# EAGLE board V3_Panel (EAGLE 9.6.0), part 1 of 3
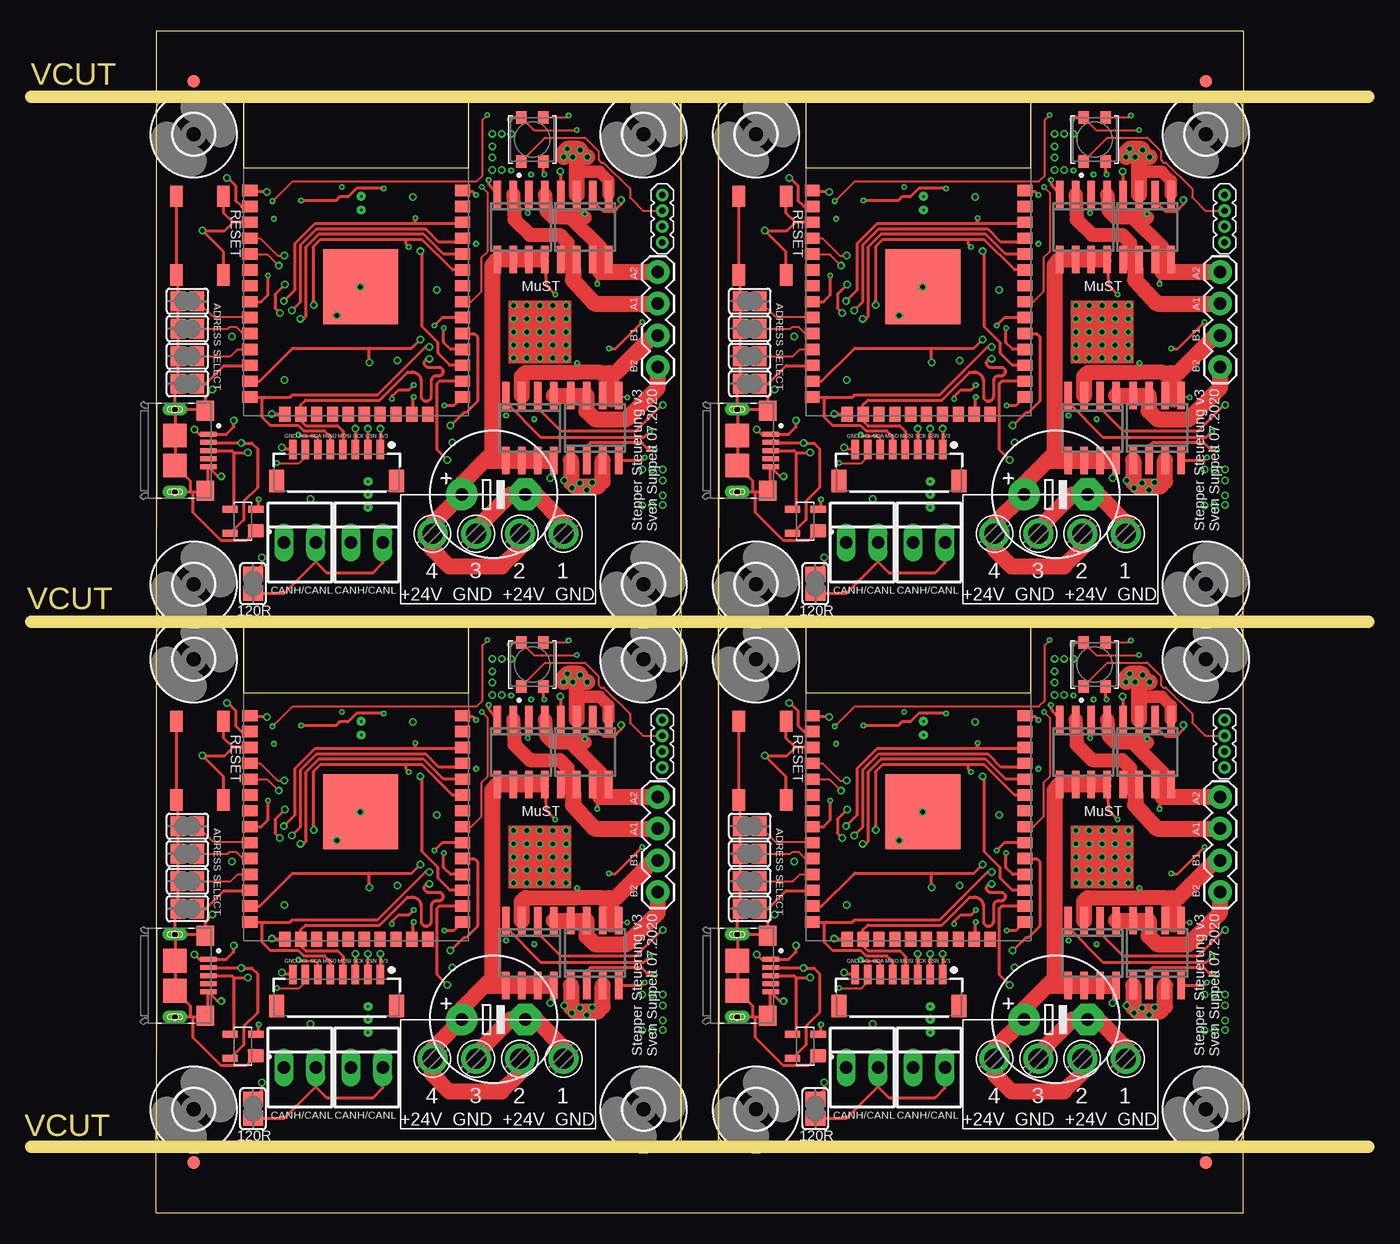
[diagram p0: board, top side]
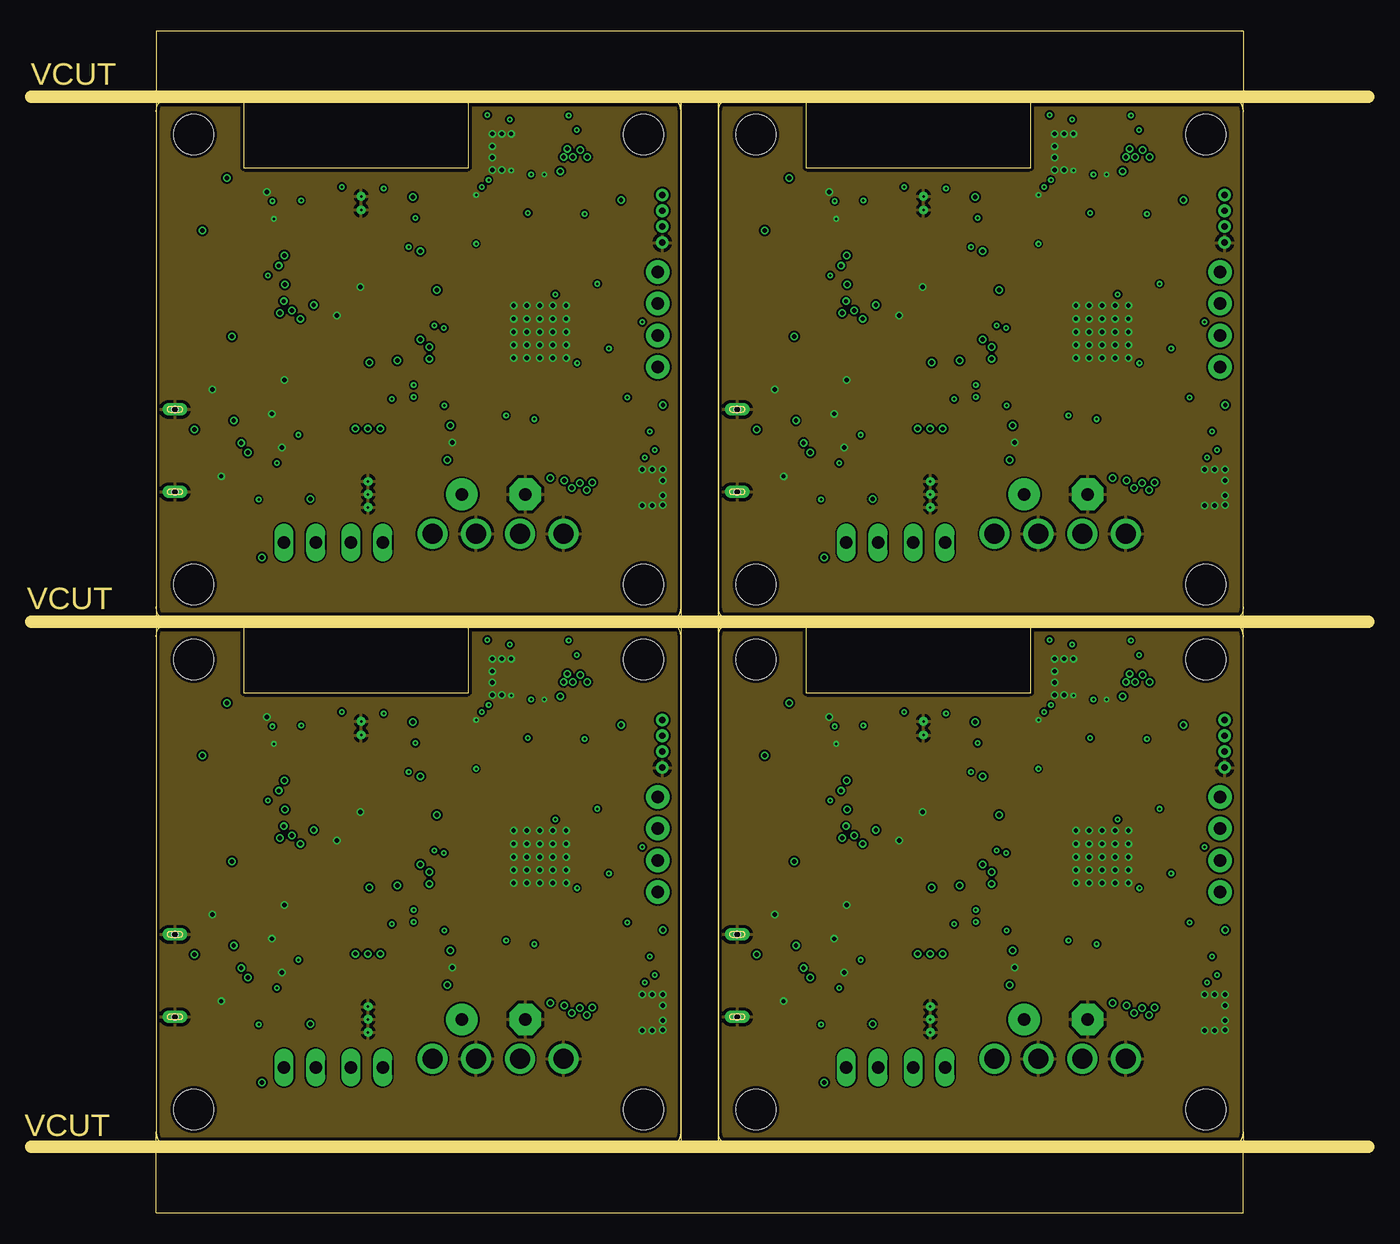
[diagram p1: board, inner layer Route2]
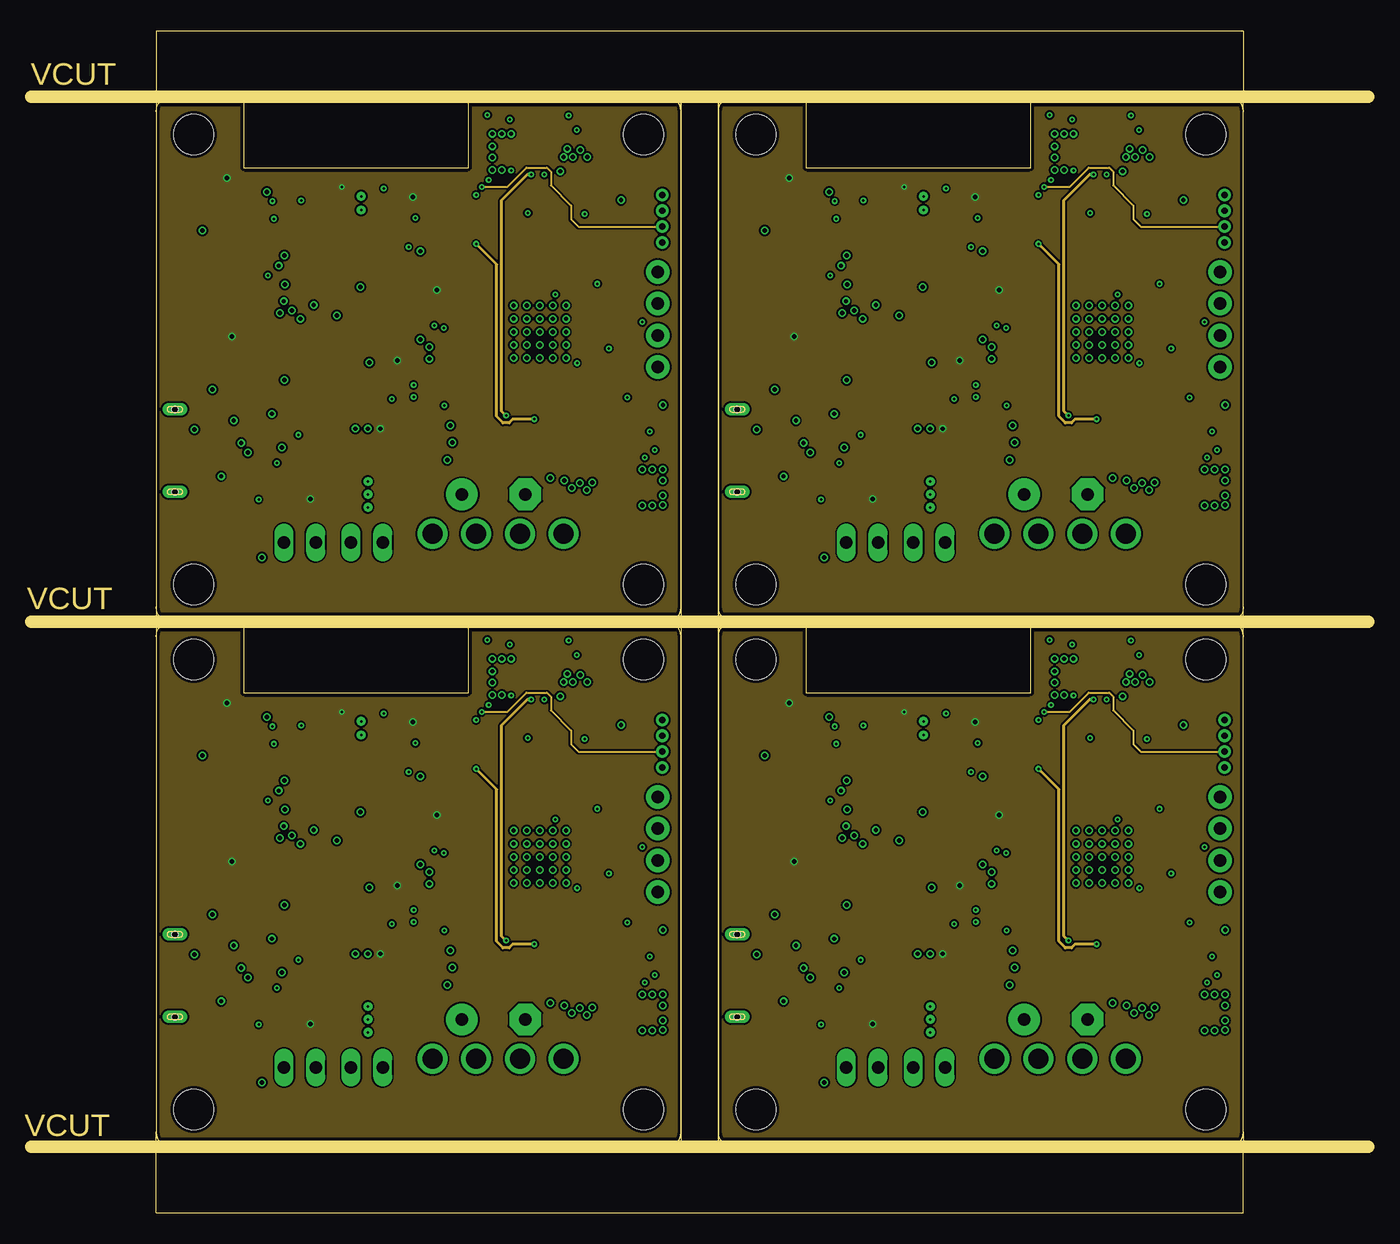
[diagram p2: board, inner layer Route15]
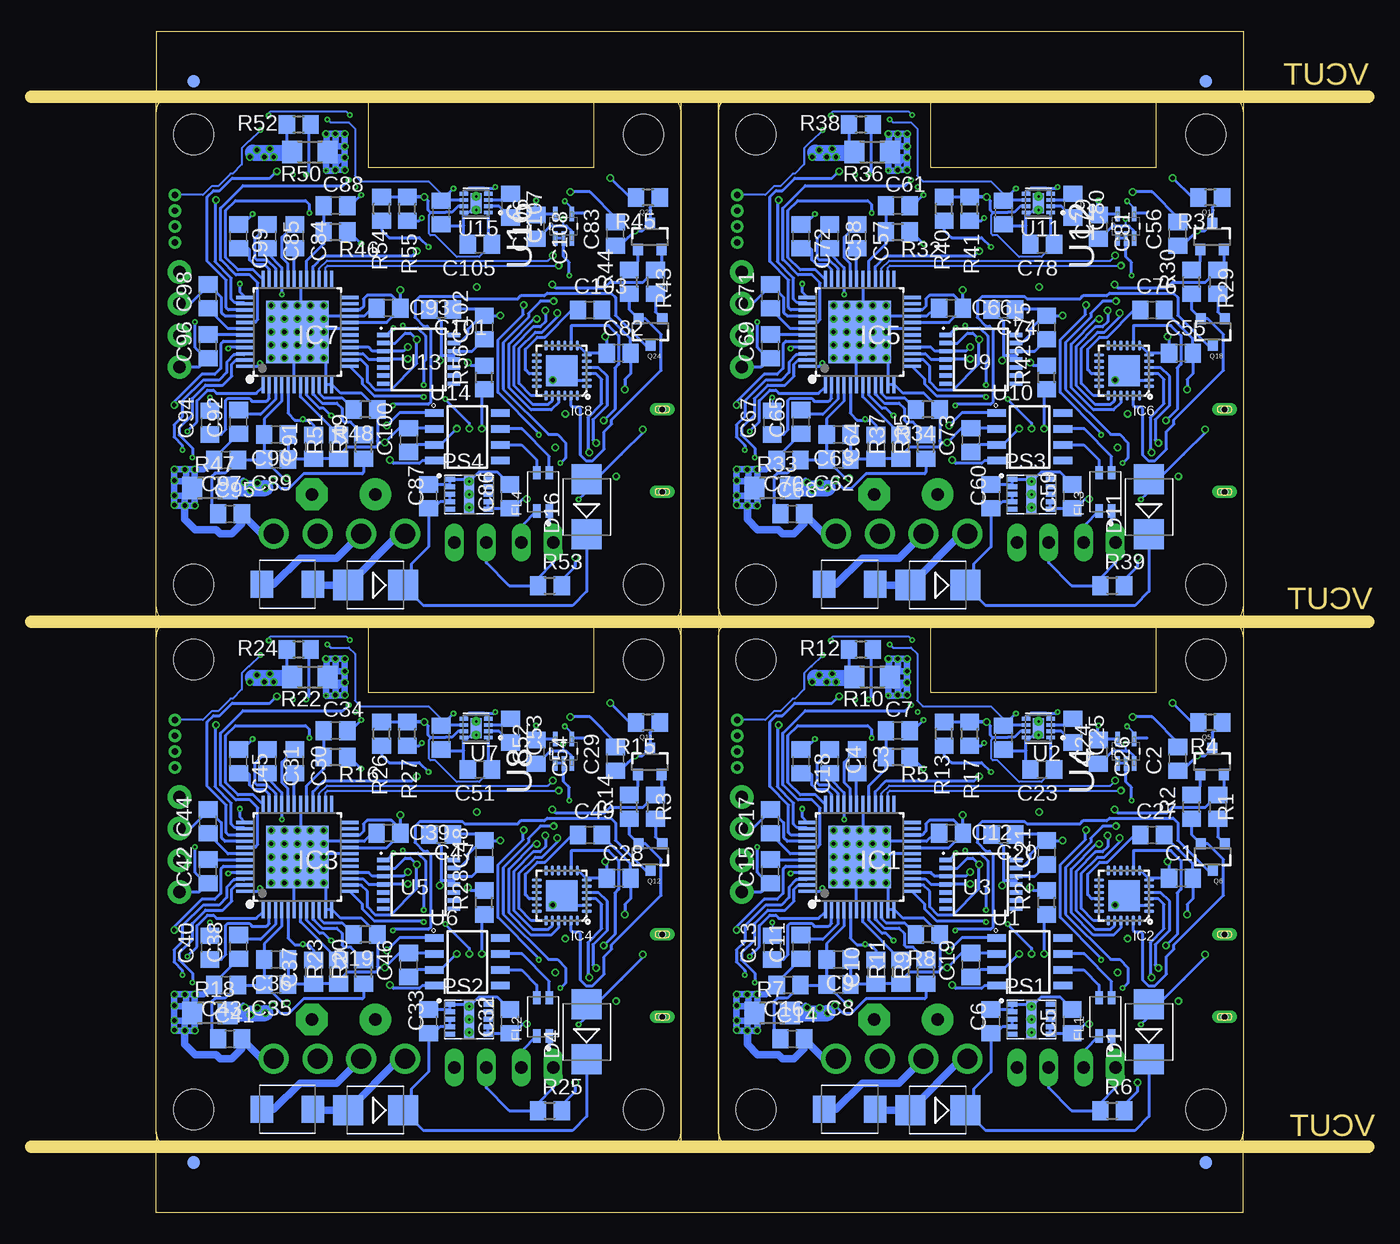
[diagram p3: board, bottom side, seen from below]

Size 107 x 94.5 mm. Coordinates in mm from the lower left corner, seen from the top.
Outline: 0,5.25 107,5.25
Outline: 0,47.25 107,47.25
Outline: 0,89.25 107,89.25
Outline: 52,6.45 52,46.05 arc90 50.8,47.25 arc90 52,48.45 52,88.05 arc90 50.8,89.25 56.2,89.25 arc90 55,88.05 55,48.45 arc90 56.2,47.25 arc90 55,46.05 55,6.45 arc90 56.2,5.25 50.8,5.25 arc90 52,6.45
Outline: 10,46.05 10,6.45 arc90 11.2,5.25 10,5.25 10,0 97,0 97,5.25 95.8,5.25 arc90 97,6.45 97,46.05 arc90 95.8,47.25 arc90 97,48.45 97,88.05 arc90 95.8,89.25 97,89.25 97,94.5 10,94.5 10,89.25 11.2,89.25 arc90 10,88.05 10,48.45 arc90 11.2,47.25 arc90 10,46.05
Outline: 16.6,47.25 arc-90 17,46.85 17,41.6 35,41.6 35,46.85 arc-90 35.4,47.25 16.6,47.25
Outline: 61.6,47.25 arc-90 62,46.85 62,41.6 80,41.6 80,46.85 arc-90 80.4,47.25 61.6,47.25
Outline: 16.6,89.25 arc-90 17,88.85 17,83.6 35,83.6 35,88.85 arc-90 35.4,89.25 16.6,89.25
Outline: 61.6,89.25 arc-90 62,88.85 62,83.6 80,83.6 80,88.85 arc-90 80.4,89.25 61.6,89.25
Copper layers (1+2)*(15+16): Top 0.035mm / dielectric 0.2mm / Route2 0.0175mm / dielectric 1.065mm / Route15 0.0175mm / dielectric 0.2mm / Bottom 0.035mm
Design rules "default *": minimum track width 6mil, minimum drill 0.2mm, track to track 6mil, track to pad 6mil, pad to pad 6mil, via to via 6mil, smd to smd 6mil, copper to edge 10mil, drill to drill 6mil, minimum pad ring 10mil, minimum via ring 0.125mm, stop-mask expansion 4mil, vias tented up to drill 0.4mm, thermal gap 10mil
Milling: area 52,5.2 to 55,89.2; area 50.8,88 to 52,89.2; area 55,88 to 56.2,89.2; area 50.8,46 to 52,48.5; area 55,46 to 56.2,48.5; area 50.8,5.2 to 52,6.5; area 55,5.2 to 56.2,6.5; area 10,5.2 to 11.2,6.5; area 10,46 to 11.2,48.5; area 10,88 to 11.2,89.2; area 95.8,88 to 97,89.2; area 95.8,46 to 97,48.5; area 95.8,5.2 to 97,6.5; area 17,83.6 to 35,89.2; area 62,83.6 to 80,89.2; area 62,41.6 to 80,47.2; area 17,41.6 to 35,47.2

## Footprints (pad centres in the part's own frame; a part is rotated, then mirrored left to right if it is on the bottom)
C0805 = smd 1.3 x 1.5: 1 -0.95,0; 2 0.95,0
E5-10,5 = drill 1.016 pad 2.54: + -2.54,0 | drill 1.016 pad 2.54 octagon: - 2.54,0
SMB = smd 2.4 x 2.4: A 2.2,0; C -2.2,0
2659 = smd 1 x 0.85: 1 -1.75,0.875; 2 -1.75,-0.875; 3 1.75,-0.875; 4 1.75,0.875
SOT143 = smd 0.99 x 1.3: 1 -0.76,-1.025 | smd 0.59 x 1.3: 2 0.96,-1.025; 3 0.96,1.025; 4 -0.96,1.025
SMBJ = smd 1.78 x 2.16: A 2.04,0; C -2.03,0
FIDUCIAL_1MM = smd 1 x 1: 1 0,0
FIL_DLW32SH110XK2L = smd 1.05 x 0.6: 1 -1.525,-0.5; 2 1.525,-0.5; 3 1.525,0.5; 4 -1.525,0.5
TQFP48-EP = smd 0.25 x 1.45: 1 -2.75,-4.175; 2 -2.25,-4.175; 3 -1.75,-4.175; 4 -1.25,-4.175; 5 -0.75,-4.175; 6 -0.25,-4.175; 7 0.25,-4.175; 8 0.75,-4.175; 9 1.25,-4.175; 10 1.75,-4.175; 11 2.25,-4.175; 12 2.75,-4.175; 25 2.75,4.175; 26 2.25,4.175; 27 1.75,4.175; 28 1.25,4.175; 29 0.75,4.175; 30 0.25,4.175; 31 -0.25,4.175; 32 -0.75,4.175; 33 -1.25,4.175; 34 -1.75,4.175; 35 -2.25,4.175; 36 -2.75,4.175 | smd 1.45 x 0.25: 13 4.175,-2.75; 14 4.175,-2.25; 15 4.175,-1.75; 16 4.175,-1.25; 17 4.175,-0.75; 18 4.175,-0.25; 19 4.175,0.25; 20 4.175,0.75; 21 4.175,1.25; 22 4.175,1.75; 23 4.175,2.25; 24 4.175,2.75; 37 -4.175,2.75; 38 -4.175,2.25; 39 -4.175,1.75; 40 -4.175,1.25; 41 -4.175,0.75; 42 -4.175,0.25; 43 -4.175,-0.25; 44 -4.175,-0.75; 45 -4.175,-1.25; 46 -4.175,-1.75; 47 -4.175,-2.25; 48 -4.175,-2.75 | smd 5 x 5: 49 0,0
QFN24_4MM_SMSC = smd 0.8 x 0.28: 1 -2,1.25; 2 -2,0.75; 3 -2,0.25; 4 -2,-0.25; 5 -2,-0.75; 6 -2,-1.25; 13 2,-1.25; 14 2,-0.75; 15 2,-0.25; 16 2,0.25; 17 2,0.75; 18 2,1.25 | smd 0.28 x 0.8: 7 -1.25,-2; 8 -0.75,-2; 9 -0.25,-2; 10 0.25,-2; 11 0.75,-2; 12 1.25,-2; 19 1.25,2; 20 0.75,2; 21 0.25,2; 22 -0.25,2; 23 -0.75,2; 24 -1.25,2 | smd 2.5 x 2.5: THERM 0,0
1X04 = drill 1.016 pad 1.88: 1 0,0; 2 2.54,0; 3 5.08,0; 4 7.62,0
BM08B-SRSS-TB = smd 0.6 x 1.55: 1 -3.5,0; 2 -2.5,0; 3 -1.5,0; 4 -0.5,0; 5 0.5,0; 6 1.5,0; 7 2.5,0; 8 3.5,0 | smd 1.2 x 1.8: P$9 4.8,2.525; P$10 -4.8,2.525
1X04_1.27MM = drill 0.508 pad 1: 1 0,0; 2 1.27,0; 3 2.54,0; 4 3.81,0
FCI_10118193-0001LF = smd 0.4 x 1.35: 1 -1.3,2.675; 2 -0.65,2.675; 3 0,2.675; 4 0.65,2.675; 5 1.3,2.675 | smd 1.6 x 1.4: S1 -3.2,2.45; S2 3.2,2.45 | smd 1.9 x 1.9: S3 1.2,0; S4 -1.2,0 | drill 0.5 pad 0.9 long: S5 -3.3,0; S6 3.3,0 | hole 0.5: -3.3,0; 3.3,0
CONV_LMZM23600V3SILT = smd 0.75 x 0.4: 1 -1.525,1.2; 2 -1.525,0.6; 3 -1.525,0; 4 -1.525,-0.6; 5 -1.525,-1.2; 6 1.525,-1.2; 7 1.525,-0.6; 8 1.525,0; 9 1.525,0.6; 10 1.525,1.2 | smd 0.8 x 3: 11 0,0 | drill 0.2 pad 0.3: 11_1 0,1.03; 11_2 0,0; 11_3 0,-1.03
SOIC8 = smd 0.6 x 2.2: 1 -1.905,-2.6; 2 -0.635,-2.6; 3 0.635,-2.6; 4 1.905,-2.6; 5 1.905,2.6; 6 0.635,2.6; 7 -0.635,2.6; 8 -1.905,2.6
SOT23-3 = smd 0.8 x 0.9: 1 -0.95,-1; 2 0.95,-1; 3 0,1.1
R0805 = smd 1.3 x 1.5: 1 -0.95,0; 2 0.95,0
R1206 = smd 1.6 x 1.803: 1 -1.422,0; 2 1.422,0
SJ = smd 1.168 x 1.6: 1 -0.762,0; 2 0.762,0
SW_TL3342F160QG = smd 1.7 x 1: 1 -3.15,-1.9; 2 3.15,-1.9; 3 -3.15,1.9; 4 3.15,1.9
SOIC127P600X175-8N = smd 1.5 x 0.6: 1 -2.65,1.905; 2 -2.65,0.635; 3 -2.65,-0.635; 4 -2.65,-1.905; 5 2.65,-1.905; 6 2.65,-0.635; 7 2.65,0.635; 8 2.65,1.905
SON50P200X200X80-9N = smd 0.76 x 0.28: 1 -0.985,0.75; 2 -0.985,0.25; 3 -0.985,-0.25; 4 -0.985,-0.75; 5 0.985,-0.75; 6 0.985,-0.25; 7 0.985,0.25; 8 0.985,0.75 | smd 0.9 x 1.6: 9 0,0 | drill 0.2 pad 0.3: 9_1 0,0.55; 9_2 0,-0.55
SOP65P640X120-14N = smd 1 x 0.35: 1 -2.825,1.95; 2 -2.825,1.3; 3 -2.825,0.65; 4 -2.825,0; 5 -2.825,-0.65; 6 -2.825,-1.3; 7 -2.825,-1.95; 8 2.825,-1.95; 9 2.825,-1.3; 10 2.825,-0.65; 11 2.825,0; 12 2.825,0.65; 13 2.825,1.3; 14 2.825,1.95
SOT65P210X110-5N = smd 1.168 x 0.356: 1 -0.965,0.66; 2 -0.965,0; 3 -0.965,-0.66; 4 0.965,-0.66; 5 0.965,0.66
3,2 = hole 3.2: 0,0
TYP184_FT = drill 1.6 pad 2.2: 1 -5.25,-0.1; 2 -1.75,-0.1; 3 1.75,-0.1; 4 5.25,-0.1
WROOM32_SKINNY = smd 1.2 x 0.9: 1 -8.5,5; 2 -8.5,3.73; 3 -8.5,2.46; 4 -8.5,1.19; 5 -8.5,-0.08; 6 -8.5,-1.35; 7 -8.5,-2.62; 8 -8.5,-3.89; 9 -8.5,-5.16; 10 -8.5,-6.43; 11 -8.5,-7.7; 12 -8.5,-8.97; 13 -8.5,-10.24; 14 -8.5,-11.51; 25 8.5,-11.51; 26 8.5,-10.24; 27 8.5,-8.97; 28 8.5,-7.7; 29 8.5,-6.43; 30 8.5,-5.16; 31 8.5,-3.89; 32 8.5,-2.62; 33 8.5,-1.35; 34 8.5,-0.08; 35 8.5,1.19; 36 8.5,2.46; 37 8.5,3.73; 38 8.5,5 | smd 0.9 x 1.2: 15 -5.7,-12.9; 16 -4.43,-12.9; 17 -3.16,-12.9; 18 -1.89,-12.9; 19 -0.62,-12.9; 20 0.65,-12.9; 21 1.92,-12.9; 22 3.19,-12.9; 23 4.46,-12.9; 24 5.73,-12.9 | smd 6 x 6: P$1 0.34,-2.7
22-23-2021 = drill 1 long: 1 -1.27,0; 2 1.27,0

## Placement (x,y rotation side)
C1  10u  [C0805]  15,26.75 0 bottom
C2  1u  [C0805]  15.25,36.3 90 bottom
C3  22nF 100V  [C0805]  40.9,36.1 270 bottom
C4  100n  [C0805]  43.1,36.1 270 bottom
C5  47u  [C0805]  23.7,15.3 90 bottom
C6  4u7  [C0805]  30.2,15.3 90 bottom
C7  470n  [C0805]  37.65,38.55 0 bottom
C8  10u/50V  [C0805]  42.4,18.25 180 bottom
C9  10u/50V  [C0805]  42.4,20.25 180 bottom
C10  2u2  [C0805]  39.4,19.25 90 bottom
C11  2u2  [C0805]  45.4,21.25 90 bottom
C12  100n  [C0805]  33.4,30.35 0 bottom
C13  100n  [C0805]  47.7,21.2 90 bottom
C14  470n  [C0805]  46.1,13.9 0 bottom
C15  100n  [C0805]  47.85,27.3 90 bottom
C16  470n  [C0805]  46.4,18.2 180 bottom
C17  100n  [C0805]  47.85,31.3 90 bottom
C18  100n  [C0805]  45.4,36.1 270 bottom
C19  100n  [C0805]  31.8,19.8 90 bottom
C20  10u  [C0805]  29.2,30.25 0 bottom
C21  100n  [C0805]  25.75,28.8 90 bottom
C22  [E5-10,5]  37,15.45 0 top
C23  4u7  [C0805]  26.1,35.45 180 bottom
C24  4u7  [C0805]  29.2,38 270 bottom
C25  1u  [C0805]  23.65,38.55 270 bottom
C26  100n  [C0805]  21.6,36.85 270 bottom
C27  4u7  [C0805]  17.3,30.2 0 bottom
C28  10u  [C0805]  60,26.75 0 bottom
C29  1u  [C0805]  60.25,36.3 90 bottom
C30  22nF 100V  [C0805]  85.9,36.1 270 bottom
C31  100n  [C0805]  88.1,36.1 270 bottom
C32  47u  [C0805]  68.7,15.3 90 bottom
C33  4u7  [C0805]  75.2,15.3 90 bottom
C34  470n  [C0805]  82.65,38.55 0 bottom
C35  10u/50V  [C0805]  87.4,18.25 180 bottom
C36  10u/50V  [C0805]  87.4,20.25 180 bottom
C37  2u2  [C0805]  84.4,19.25 90 bottom
C38  2u2  [C0805]  90.4,21.25 90 bottom
C39  100n  [C0805]  78.4,30.35 0 bottom
C40  100n  [C0805]  92.7,21.2 90 bottom
C41  470n  [C0805]  91.1,13.9 0 bottom
C42  100n  [C0805]  92.85,27.3 90 bottom
C43  470n  [C0805]  91.4,18.2 180 bottom
C44  100n  [C0805]  92.85,31.3 90 bottom
C45  100n  [C0805]  90.4,36.1 270 bottom
C46  100n  [C0805]  76.8,19.8 90 bottom
C47  10u  [C0805]  74.2,30.25 0 bottom
C48  100n  [C0805]  70.75,28.8 90 bottom
C49  4u7  [C0805]  62.3,30.2 0 bottom
C50  [E5-10,5]  82,15.45 0 top
C51  4u7  [C0805]  71.1,35.45 180 bottom
C52  4u7  [C0805]  74.2,38 270 bottom
C53  1u  [C0805]  68.65,38.55 270 bottom
C54  100n  [C0805]  66.6,36.85 270 bottom
C55  10u  [C0805]  15,68.75 0 bottom
C56  1u  [C0805]  15.25,78.3 90 bottom
C57  22nF 100V  [C0805]  40.9,78.1 270 bottom
C58  100n  [C0805]  43.1,78.1 270 bottom
C59  47u  [C0805]  23.7,57.3 90 bottom
C60  4u7  [C0805]  30.2,57.3 90 bottom
C61  470n  [C0805]  37.65,80.55 0 bottom
C62  10u/50V  [C0805]  42.4,60.25 180 bottom
C63  10u/50V  [C0805]  42.4,62.25 180 bottom
C64  2u2  [C0805]  39.4,61.25 90 bottom
C65  2u2  [C0805]  45.4,63.25 90 bottom
C66  100n  [C0805]  33.4,72.35 0 bottom
C67  100n  [C0805]  47.7,63.2 90 bottom
C68  470n  [C0805]  46.1,55.9 0 bottom
C69  100n  [C0805]  47.85,69.3 90 bottom
C70  470n  [C0805]  46.4,60.2 180 bottom
C71  100n  [C0805]  47.85,73.3 90 bottom
C72  100n  [C0805]  45.4,78.1 270 bottom
C73  100n  [C0805]  31.8,61.8 90 bottom
C74  10u  [C0805]  29.2,72.25 0 bottom
C75  100n  [C0805]  25.75,70.8 90 bottom
C76  4u7  [C0805]  17.3,72.2 0 bottom
C77  [E5-10,5]  37,57.45 0 top
C78  4u7  [C0805]  26.1,77.45 180 bottom
C79  4u7  [C0805]  29.2,80 270 bottom
C80  1u  [C0805]  23.65,80.55 270 bottom
C81  100n  [C0805]  21.6,78.85 270 bottom
C82  10u  [C0805]  60,68.75 0 bottom
C83  1u  [C0805]  60.25,78.3 90 bottom
C84  22nF 100V  [C0805]  85.9,78.1 270 bottom
C85  100n  [C0805]  88.1,78.1 270 bottom
C86  47u  [C0805]  68.7,57.3 90 bottom
C87  4u7  [C0805]  75.2,57.3 90 bottom
C88  470n  [C0805]  82.65,80.55 0 bottom
C89  10u/50V  [C0805]  87.4,60.25 180 bottom
C90  10u/50V  [C0805]  87.4,62.25 180 bottom
C91  2u2  [C0805]  84.4,61.25 90 bottom
C92  2u2  [C0805]  90.4,63.25 90 bottom
C93  100n  [C0805]  78.4,72.35 0 bottom
C94  100n  [C0805]  92.7,63.2 90 bottom
C95  470n  [C0805]  91.1,55.9 0 bottom
C96  100n  [C0805]  92.85,69.3 90 bottom
C97  470n  [C0805]  91.4,60.2 180 bottom
C98  100n  [C0805]  92.85,73.3 90 bottom
C99  100n  [C0805]  90.4,78.1 270 bottom
C100  100n  [C0805]  76.8,61.8 90 bottom
C101  10u  [C0805]  74.2,72.25 0 bottom
C102  100n  [C0805]  70.75,70.8 90 bottom
C103  4u7  [C0805]  62.3,72.2 0 bottom
C104  [E5-10,5]  82,57.45 0 top
C105  4u7  [C0805]  71.1,77.45 180 bottom
C106  4u7  [C0805]  74.2,80 270 bottom
C107  1u  [C0805]  68.65,80.55 270 bottom
C108  100n  [C0805]  66.6,78.85 270 bottom
D1  Schottky  [SMB]  17.55,14.45 90 bottom
D2  Schottky  [SMB]  34.45,8.2 180 bottom
D3  2659  [2659]  40.1,43.85 90 top
D4  Schottky  [SMB]  62.55,14.45 90 bottom
D5  Schottky  [SMB]  79.45,8.2 180 bottom
D6  SP0503BAHTG  [SOT143]  61.95,13.3 90 top
D7  SP0503BAHTG  [SOT143]  16.95,13.3 90 top
D8  SMBJ30AQ-13-F  [SMBJ]  86.5,8.25 180 bottom
D9  2659  [2659]  85.1,43.85 90 top
D10  SMBJ30AQ-13-F  [SMBJ]  41.5,8.25 180 bottom
D11  Schottky  [SMB]  17.55,56.45 90 bottom
D12  Schottky  [SMB]  34.45,50.2 180 bottom
D13  SP0503BAHTG  [SOT143]  16.95,55.3 90 top
D14  SMBJ30AQ-13-F  [SMBJ]  41.5,50.25 180 bottom
D15  2659  [2659]  40.1,85.85 90 top
D16  Schottky  [SMB]  62.55,56.45 90 bottom
D17  Schottky  [SMB]  79.45,50.2 180 bottom
D18  SP0503BAHTG  [SOT143]  61.95,55.3 90 top
D19  SMBJ30AQ-13-F  [SMBJ]  86.5,50.25 180 bottom
D20  2659  [2659]  85.1,85.85 90 top
E$1  [FIDUCIAL_1MM]  13,4 0 top
E$2  [FIDUCIAL_1MM]  94,4 0 top
E$3  [FIDUCIAL_1MM]  94,90.5 0 top
E$4  [FIDUCIAL_1MM]  13,90.5 0 top
E$5  [FIDUCIAL_1MM]  13,4 0 bottom
E$6  [FIDUCIAL_1MM]  94,90.5 0 bottom
E$7  [FIDUCIAL_1MM]  13,90.5 0 bottom
E$8  [FIDUCIAL_1MM]  94,4 0 bottom
FL1  DLW32SH220XK2L  [FIL_DLW32SH110XK2L]  21.05,15.65 90 bottom
FL2  DLW32SH220XK2L  [FIL_DLW32SH110XK2L]  66.05,15.65 90 bottom
FL3  DLW32SH220XK2L  [FIL_DLW32SH110XK2L]  21.05,57.65 90 bottom
FL4  DLW32SH220XK2L  [FIL_DLW32SH110XK2L]  66.05,57.65 90 bottom
IC1  TMC5160-TA  [TQFP48-EP]  40.7,28.45 0 bottom
IC2  CP2104  [QFN24_4MM_SMSC]  19.55,25.35 180 bottom
IC3  TMC5160-TA  [TQFP48-EP]  85.7,28.45 0 bottom
IC4  CP2104  [QFN24_4MM_SMSC]  64.55,25.35 180 bottom
IC5  TMC5160-TA  [TQFP48-EP]  40.7,70.45 0 bottom
IC6  CP2104  [QFN24_4MM_SMSC]  19.55,67.35 180 bottom
IC7  TMC5160-TA  [TQFP48-EP]  85.7,70.45 0 bottom
IC8  CP2104  [QFN24_4MM_SMSC]  64.55,67.35 180 bottom
J1  [1X04]  50.15,33.25 270 top
J2  [BM08B-SRSS-TB]  24.45,19.05 180 top
J3  [1X04_1.27MM]  50.5,35.6 90 top
J4  10118193-0001LF  [FCI_10118193-0001LF]  11.5,18.95 270 top
J5  [1X04]  95.15,33.25 270 top
J6  [BM08B-SRSS-TB]  69.45,19.05 180 top
J7  [1X04_1.27MM]  95.5,35.6 90 top
J8  10118193-0001LF  [FCI_10118193-0001LF]  56.5,18.95 270 top
J9  [1X04]  50.15,75.25 270 top
J10  [BM08B-SRSS-TB]  24.45,61.05 180 top
J11  [1X04_1.27MM]  50.5,77.6 90 top
J12  10118193-0001LF  [FCI_10118193-0001LF]  11.5,60.95 270 top
J13  [1X04]  95.15,75.25 270 top
J14  [BM08B-SRSS-TB]  69.45,61.05 180 top
J15  [1X04_1.27MM]  95.5,77.6 90 top
J16  10118193-0001LF  [FCI_10118193-0001LF]  56.5,60.95 270 top
PS1  LMZM23600V3SILT  [CONV_LMZM23600V3SILT]  26.95,15.45 0 bottom
PS2  LMZM23600V3SILT  [CONV_LMZM23600V3SILT]  71.95,15.45 0 bottom
PS3  LMZM23600V3SILT  [CONV_LMZM23600V3SILT]  26.95,57.45 0 bottom
PS4  LMZM23600V3SILT  [CONV_LMZM23600V3SILT]  71.95,57.45 0 bottom
Q1  AO4882"  [SOIC8]  39.9,20.75 180 top
Q2  AO4882"  [SOIC8]  45.1,20.75 0 top
Q3  AO4882"  [SOIC8]  39.2,36.85 180 top
Q4  AO4882"  [SOIC8]  44.3,36.85 180 top
Q5  BC817  [SOT23-3]  12.5,36.05 0 bottom
Q6  BC817  [SOT23-3]  12.45,28.5 180 bottom
Q7  AO4882"  [SOIC8]  84.9,20.75 180 top
Q8  AO4882"  [SOIC8]  90.1,20.75 0 top
Q9  AO4882"  [SOIC8]  84.2,36.85 180 top
Q10  AO4882"  [SOIC8]  89.3,36.85 180 top
Q11  BC817  [SOT23-3]  57.5,36.05 0 bottom
Q12  BC817  [SOT23-3]  57.45,28.5 180 bottom
Q13  AO4882"  [SOIC8]  39.9,62.75 180 top
Q14  AO4882"  [SOIC8]  45.1,62.75 0 top
Q15  AO4882"  [SOIC8]  39.2,78.85 180 top
Q16  AO4882"  [SOIC8]  44.3,78.85 180 top
Q17  BC817  [SOT23-3]  12.5,78.05 0 bottom
Q18  BC817  [SOT23-3]  12.45,70.5 180 bottom
Q19  AO4882"  [SOIC8]  84.9,62.75 180 top
Q20  AO4882"  [SOIC8]  90.1,62.75 0 top
Q21  AO4882"  [SOIC8]  84.2,78.85 180 top
Q22  AO4882"  [SOIC8]  89.3,78.85 180 top
Q23  BC817  [SOT23-3]  57.5,78.05 0 bottom
Q24  BC817  [SOT23-3]  57.45,70.5 180 bottom
R1  1k  [R0805]  12.05,32.45 270 bottom
R2  1k  [R0805]  14.15,32.45 90 bottom
R3  1k  [R0805]  57.05,32.45 270 bottom
R4  10k  [R0805]  12.65,39.2 180 bottom
R5  2R2  [R0805]  37.65,36.45 0 bottom
R6  120R  [R0805]  20.5,8.15 0 bottom
R7  0R075  [R1206]  47.7,15.95 0 bottom
R8  49R9  [R0805]  35.25,22.25 180 bottom
R9  49R9  [R0805]  35.4,19.25 90 bottom
R10  0R075  [R1206]  39.7,42.85 180 bottom
R11  49R9  [R0805]  37.4,19.25 90 bottom
R12  49R9  [R0805]  40.6,45.05 0 bottom
R13  10k  [R0805]  33.95,38.3 90 bottom
R14  1k  [R0805]  59.15,32.45 90 bottom
R15  10k  [R0805]  57.65,39.2 180 bottom
R16  2R2  [R0805]  82.65,36.45 0 bottom
R17  10k  [R0805]  31.9,38.3 90 bottom
R18  0R075  [R1206]  92.7,15.95 0 bottom
R19  49R9  [R0805]  80.25,22.25 180 bottom
R20  49R9  [R0805]  80.4,19.25 90 bottom
R21  49R9  [R0805]  25.75,24.8 90 bottom
R22  0R075  [R1206]  84.7,42.85 180 bottom
R23  49R9  [R0805]  82.4,19.25 90 bottom
R24  49R9  [R0805]  85.6,45.05 0 bottom
R25  120R  [R0805]  65.5,8.15 0 bottom
R26  10k  [R0805]  78.95,38.3 90 bottom
R27  10k  [R0805]  76.9,38.3 90 bottom
R28  49R9  [R0805]  70.75,24.8 90 bottom
R29  1k  [R0805]  12.05,74.45 270 bottom
R30  1k  [R0805]  14.15,74.45 90 bottom
R31  10k  [R0805]  12.65,81.2 180 bottom
R32  2R2  [R0805]  37.65,78.45 0 bottom
R33  0R075  [R1206]  47.7,57.95 0 bottom
R34  49R9  [R0805]  35.25,64.25 180 bottom
R35  49R9  [R0805]  35.4,61.25 90 bottom
R36  0R075  [R1206]  39.7,84.85 180 bottom
R37  49R9  [R0805]  37.4,61.25 90 bottom
R38  49R9  [R0805]  40.6,87.05 0 bottom
R39  120R  [R0805]  20.5,50.15 0 bottom
R40  10k  [R0805]  33.95,80.3 90 bottom
R41  10k  [R0805]  31.9,80.3 90 bottom
R42  49R9  [R0805]  25.75,66.8 90 bottom
R43  1k  [R0805]  57.05,74.45 270 bottom
R44  1k  [R0805]  59.15,74.45 90 bottom
R45  10k  [R0805]  57.65,81.2 180 bottom
R46  2R2  [R0805]  82.65,78.45 0 bottom
R47  0R075  [R1206]  92.7,57.95 0 bottom
R48  49R9  [R0805]  80.25,64.25 180 bottom
R49  49R9  [R0805]  80.4,61.25 90 bottom
R50  0R075  [R1206]  84.7,84.85 180 bottom
R51  49R9  [R0805]  82.4,61.25 90 bottom
R52  49R9  [R0805]  85.6,87.05 0 bottom
R53  120R  [R0805]  65.5,50.15 0 bottom
R54  10k  [R0805]  78.95,80.3 90 bottom
R55  10k  [R0805]  76.9,80.3 90 bottom
R56  49R9  [R0805]  70.75,66.8 90 bottom
SJ1  [SJ]  57.5,30.9 0 top
SJ2  [SJ]  57.5,28.7 0 top
SJ3  [SJ]  57.5,26.5 0 top
SJ4  [SJ]  57.5,24.3 0 top
SJ5  [SJ]  12.5,30.9 0 top
SJ6  [SJ]  12.5,28.7 0 top
SJ7  [SJ]  12.5,26.5 0 top
SJ8  [SJ]  12.5,24.3 0 top
SJ9  [SJ]  17.75,8.3 90 top
SJ10  [SJ]  62.75,8.3 90 top
SJ11  [SJ]  12.5,72.9 0 top
SJ12  [SJ]  12.5,70.7 0 top
SJ13  [SJ]  12.5,68.5 0 top
SJ14  [SJ]  12.5,66.3 0 top
SJ15  [SJ]  17.75,50.3 90 top
SJ16  [SJ]  57.5,72.9 0 top
SJ17  [SJ]  57.5,70.7 0 top
SJ18  [SJ]  57.5,68.5 0 top
SJ19  [SJ]  57.5,66.3 0 top
SJ20  [SJ]  62.75,50.3 90 top
SW1  TL3342F160QG  [SW_TL3342F160QG]  13.5,36.15 90 top
SW2  TL3342F160QG  [SW_TL3342F160QG]  58.5,36.15 90 top
SW3  TL3342F160QG  [SW_TL3342F160QG]  13.5,78.15 90 top
SW4  TL3342F160QG  [SW_TL3342F160QG]  58.5,78.15 90 top
U1  SN65HVD232  [SOIC127P600X175-8N]  27.1,20.05 0 bottom
U2  LM2775QDSGTQ1  [SON50P200X200X80-9N]  26.4,38.75 180 bottom
U3  AS5048A-HTSP  [SOP65P640X120-14N]  31,26.25 0 bottom
U4  74LVC1G08  [SOT65P210X110-5N]  19.4,36.9 90 bottom
U5  AS5048A-HTSP  [SOP65P640X120-14N]  76,26.25 0 bottom
U6  SN65HVD232  [SOIC127P600X175-8N]  72.1,20.05 0 bottom
U7  LM2775QDSGTQ1  [SON50P200X200X80-9N]  71.4,38.75 180 bottom
U8  74LVC1G08  [SOT65P210X110-5N]  64.4,36.9 90 bottom
U9  AS5048A-HTSP  [SOP65P640X120-14N]  31,68.25 0 bottom
U10  SN65HVD232  [SOIC127P600X175-8N]  27.1,62.05 0 bottom
U11  LM2775QDSGTQ1  [SON50P200X200X80-9N]  26.4,80.75 180 bottom
U12  74LVC1G08  [SOT65P210X110-5N]  19.4,78.9 90 bottom
U13  AS5048A-HTSP  [SOP65P640X120-14N]  76,68.25 0 bottom
U14  SN65HVD232  [SOIC127P600X175-8N]  72.1,62.05 0 bottom
U15  LM2775QDSGTQ1  [SON50P200X200X80-9N]  71.4,80.75 180 bottom
U16  74LVC1G08  [SOT65P210X110-5N]  64.4,78.9 90 bottom
U$1  [3,2]  13,44.25 0 top
U$2  [3,2]  49,44.25 0 top
U$3  [3,2]  13,8.25 0 top
U$4  [3,2]  49,8.25 0 top
U$5  [3,2]  58,44.25 0 top
U$6  [3,2]  94,44.25 0 top
U$7  [3,2]  58,8.25 0 top
U$8  [3,2]  94,8.25 0 top
U$9  [3,2]  13,86.25 0 top
U$10  [3,2]  49,86.25 0 top
U$11  [3,2]  13,50.25 0 top
U$12  [3,2]  49,50.25 0 top
U$13  [3,2]  58,86.25 0 top
U$14  [3,2]  94,86.25 0 top
U$15  [3,2]  58,50.25 0 top
U$16  [3,2]  94,50.25 0 top
X1  PT11304HBBN  [TYP184_FT]  37.35,12.2 180 top
X2  ESP32_WROOM32_SKINNY  [WROOM32_SKINNY]  26,34.75 0 top
X3  ESP32_WROOM32_SKINNY  [WROOM32_SKINNY]  71,34.75 0 top
X4  22-23-2021  [22-23-2021]  71.85,11.6 0 top
X5  22-23-2021  [22-23-2021]  66.5,11.6 0 top
X6  22-23-2021  [22-23-2021]  26.85,11.6 0 top
X7  22-23-2021  [22-23-2021]  21.5,11.6 0 top
X8  PT11304HBBN  [TYP184_FT]  82.35,12.2 180 top
X9  ESP32_WROOM32_SKINNY  [WROOM32_SKINNY]  26,76.75 0 top
X10  22-23-2021  [22-23-2021]  26.85,53.6 0 top
X11  22-23-2021  [22-23-2021]  21.5,53.6 0 top
X12  PT11304HBBN  [TYP184_FT]  37.35,54.2 180 top
X13  ESP32_WROOM32_SKINNY  [WROOM32_SKINNY]  71,76.75 0 top
X14  22-23-2021  [22-23-2021]  71.85,53.6 0 top
X15  22-23-2021  [22-23-2021]  66.5,53.6 0 top
X16  PT11304HBBN  [TYP184_FT]  82.35,54.2 180 top

## Library data of the parts
C1-C21 C23-C49 C51-C76 C78-C103 C105-C108 = rcl; SPICEPREFIX: C
C22 C50 C77 C104 = resistor
D1 D2 D4 D5 D8 D10-D12 D14 D16 D17 D19 = diode
D3 D9 D15 D20 = 2659; AVAILABILITY: Unavailable; DESCRIPTION: Addressable Lighting Neopixel 10 LED Discrete Serial _Shift Register_ Red, Green, Blue _RGB_ 3.50mm L x 3.50mm W; MF: Adafruit Industries; MP: 2659; PACKAGE: TQFP-32 Adafruit Industries; PRICE: None
D6 D7 D13 D18 = SP0503BAHTG; AVAILABILITY: Unavailable; DESCRIPTION: SP050xBA Series 8 V 30 pF Uni-Directional SMT TVS Avalanche Diode Array SOT-143; MF: Littelfuse Inc.; MP: SP0503BAHTG; PACKAGE: SOT-143 Littelfuse; PRICE: None
E$1-E$8 = audio amplifier example
FL1-FL4 = DLW32SH110XK2L; AVAILABILITY: Unavailable; DESCRIPTION: 11µH @ 100kHz 2 Line Common Mode Choke Surface Mount 300mA DCR 400mOhm; MF: Murata; MP: DLW32SH110XK2L; PACKAGE: Horizontal-4 Murata; PRICE: None
IC1 IC3 IC5 IC7 = TMC5160-TA; AVAILABILITY: Unavailable; DESCRIPTION: Motor Driver, Stepper, Tqfp-48; MF: Trinamic Motion; MP: TMC5160-TA; PACKAGE: TQFP-48 Trinamic Motion; PRICE: None
IC2 IC4 IC6 IC8 X2 X3 X9 X13 = microbuilder
J1 J5 J9 J13 = SparkFun-Connectors; PROD_ID: CONN-09696
J2 J6 J10 J14 = SparkFun-Connectors; PROD_ID: CONN-10556
J3 J7 J11 J15 = SparkFun-Connectors
J4 J8 J12 J16 = 10118193-0001LF; AVAILABILITY: Unavailable; DESCRIPTION: USB - micro B USB 2.0 Receptacle Connector 5 Position Surface Mount, Right Angle; Through Hole; DIGIKEY-PURCHASE-URL: https://snapeda.com/shop?store=DigiKey&id=4800618; MF: Amphenol ICC (FCI); MOUSER-PURCHASE-URL: https://snapeda.com/shop?store=Mouser&id=4800618; MP: 10118193-0001LF; PACKAGE: None; PRICE: None
PS1-PS4 = LMZM23600V3SILT; AVAILABILITY: Unavailable; DESCRIPTION: 36-V, 0.5-A Step-Down DC/DC Power Module in 3.8-mm × 3-mm Package 10-uSiP -40 to 125; MF: Texas Instruments; MP: LMZM23600V3SILT; PACKAGE: Module Texas Instruments; PRICE: None
Q1-Q4 Q7-Q10 Q13-Q16 Q19-Q22 = AO4882
Q5 Q6 Q11 Q12 Q17 Q18 Q23 Q24 = SparkFun
R1-R56 = rcl; SPICEPREFIX: R
SJ1-SJ20 = jumper
SW1-SW4 = TL3342F160QG; AVAILABILITY: Unavailable; DESCRIPTION: TL3342 Series SPST 1.6 N Round Button Gull Wing Surface Mount Tactile Switch; MF: E-Switch; MP: TL3342F160QG; PACKAGE: None; PRICE: None
U1 U6 U10 U14 = MCP2562-E_SN; AVAILABILITY: Unavailable; DESCRIPTION: Microchip MCP2562-E/SN, CAN Transceiver 1MBps 1-channel IEC 61000-4-2, 8-Pin SOIC; MF: Microchip; MP: MCP2562-E/SN; PACKAGE: SO-8 Microchip; PRICE: None
U2 U7 U11 U15 = LM2775QDSGTQ1; AVAILABILITY: Unavailable; DESCRIPTION: Charge Pump Switching Regulator IC Positive Fixed 5V 1 Output 200mA 8-WDFN Exposed Pad; MF: Texas Instruments; MP: LM2775QDSGTQ1; PACKAGE: WDFN-8 Texas Instruments; PRICE: None
U3 U5 U9 U13 = AS5048A-HTSP; AVAILABILITY: Unavailable; DESCRIPTION: Ic Encoder Rotary 14-Tssop; MF: ams; MP: AS5048A-HTSP; PACKAGE: TSSOP-14 ams; PRICE: None
U4 U8 U12 U16 = 74LVC1G00GW; AVAILABILITY: Unavailable; DESCRIPTION: NAND Gate 1-Element 2-IN CMOS 5-Pin TSSOP T/R; MF: Nexperia; MP: 74LVC1G00GW; PACKAGE: None; PRICE: None
U$1-U$16 = holes
X1 X8 X12 X16 = MetzConnect182_183
X4-X7 X10 X11 X14 X15 = con-molex; MF: MOLEX; MPN: 22-23-2021; OC_FARNELL: 1462926; OC_NEWARK: 25C3832

## Nets
+3V1: C28.1 C32.1 C39.2 C46.1 C47.1 C48.1 C51.1 IC3.20 IC3.22 IC4.5 IC4.6 IC4.7 J6.1 PS2.6 PS2.7 R15.2 R26.2 R27.2 U5.11 U5.12 U6.3 U7.1 U7.4 U7.5 U7.7 X3.2
+3V2: C55.1 C59.1 C66.2 C73.1 C74.1 C75.1 C78.1 IC5.20 IC5.22 IC6.5 IC6.6 IC6.7 J10.1 PS3.6 PS3.7 R31.2 R40.2 R41.2 U9.11 U9.12 U10.3 U11.1 U11.4 U11.5 U11.7 X9.2
+3V3: C1.1 C5.1 C12.2 C19.1 C20.1 C21.1 C23.1 IC1.20 IC1.22 IC2.5 IC2.6 IC2.7 J2.1 PS1.6 PS1.7 R4.2 R13.2 R17.2 U1.3 U2.1 U2.4 U2.5 U2.7 U3.11 U3.12 X2.2
+3V4: C82.1 C86.1 C93.2 C100.1 C101.1 C102.1 C105.1 IC7.20 IC7.22 IC8.5 IC8.6 IC8.7 J14.1 PS4.6 PS4.7 R45.2 R54.2 R55.2 U13.11 U13.12 U14.3 U15.1 U15.4 U15.5 U15.7 X13.2
+5V: C10.2 IC1.5 R5.2
+5V1: C37.2 IC3.5 R16.2
+5V2: C64.2 IC5.5 R32.2
+5V3: C91.2 IC7.5 R46.2
+5V_LED: C24.1 C26.1 D3.4 J3.4 U2.6 U4.5
+5V_LED1: C52.1 C54.1 D9.4 J7.4 U7.6 U8.5
+5V_LED2: C79.1 C81.1 D15.4 J11.4 U11.6 U12.5
+5V_LED3: C106.1 C108.1 D20.4 J15.4 U15.6 U16.5
+12V: C11.2 IC1.3
+12V1: C38.2 IC3.3
+12V2: C65.2 IC5.3
+12V3: C92.2 IC7.3
+24V: C4.2 C8.2 C9.2 C14.1 C16.1 C22.+ D2.A D10.C IC1.4 IC1.33 Q1.5 Q1.6 Q1.7 Q1.8 Q3.5 Q3.6 Q3.7 Q3.8 X1.2 X1.4
+24V1: C31.2 C35.2 C36.2 C41.1 C43.1 C50.+ D5.A D8.C IC3.4 IC3.33 Q7.5 Q7.6 Q7.7 Q7.8 Q9.5 Q9.6 Q9.7 Q9.8 X8.2 X8.4
+24V2: C58.2 C62.2 C63.2 C68.1 C70.1 C77.+ D12.A D14.C IC5.4 IC5.33 Q13.5 Q13.6 Q13.7 Q13.8 Q15.5 Q15.6 Q15.7 Q15.8 X12.2 X12.4
+24V3: C85.2 C89.2 C90.2 C95.1 C97.1 C104.+ D17.A D19.C IC7.4 IC7.33 Q19.5 Q19.6 Q19.7 Q19.8 Q21.5 Q21.6 Q21.7 Q21.8 X16.2 X16.4
BMA1: C17.2 IC1.40 J1.2 Q3.3 Q4.5 Q4.6
BMA2: C18.1 IC1.37 J1.1 Q3.1 Q4.7 Q4.8
BMA3: C45.1 IC3.37 J5.1 Q9.1 Q10.7 Q10.8
BMA4: C44.2 IC3.40 J5.2 Q9.3 Q10.5 Q10.6
BMA5: C72.1 IC5.37 J9.1 Q15.1 Q16.7 Q16.8
BMA6: C71.2 IC5.40 J9.2 Q15.3 Q16.5 Q16.6
BMA7: C99.1 IC7.37 J13.1 Q21.1 Q22.7 Q22.8
BMA8: C98.2 IC7.40 J13.2 Q21.3 Q22.5 Q22.6
BMB1: C13.2 IC1.48 J1.3 Q1.3 Q2.5 Q2.6
BMB2: C15.1 IC1.45 J1.4 Q1.1 Q2.7 Q2.8
BMB3: C40.2 IC3.48 J5.3 Q7.3 Q8.5 Q8.6
BMB4: C42.1 IC3.45 J5.4 Q7.1 Q8.7 Q8.8
BMB5: C67.2 IC5.48 J9.3 Q13.3 Q14.5 Q14.6
BMB6: C69.1 IC5.45 J9.4 Q13.1 Q14.7 Q14.8
BMB7: C94.2 IC7.48 J13.3 Q19.3 Q20.5 Q20.6
BMB8: C96.1 IC7.45 J13.4 Q19.1 Q20.7 Q20.8
CA1: C17.1 IC1.42
CA2: C18.2 IC1.35
CA3: C44.1 IC3.42
CA4: C45.2 IC3.35
CA5: C71.1 IC5.42
CA6: C72.2 IC5.35
CA7: C98.1 IC7.42
CA8: C99.2 IC7.35
CANH: FL1.1 R6.1 X6.1 X7.1
CANH1: FL2.1 R25.1 X4.1 X5.1
CANH2: FL3.1 R39.1 X10.1 X11.1
CANH3: FL4.1 R53.1 X14.1 X15.1
CANL: FL1.4 SJ9.1 X6.2 X7.2
CANL1: FL2.4 SJ10.1 X4.2 X5.2
CANL2: FL3.4 SJ15.1 X10.2 X11.2
CANL3: FL4.4 SJ20.1 X14.2 X15.2
CB1: C13.1 IC1.2
CB2: C15.2 IC1.43
CB3: C42.2 IC3.43
CB4: C40.1 IC3.2
CB5: C69.2 IC5.43
CB6: C67.1 IC5.2
CB7: C96.2 IC7.43
CB8: C94.1 IC7.2
DTR: IC2.23 Q6.2 R2.1
DTR1: IC4.23 Q12.2 R14.1
DTR2: IC6.23 Q18.2 R30.1
DTR3: IC8.23 Q24.2 R44.1
GND: C1.2 C2.2 C5.2 C6.2 C7.2 C8.1 C9.1 C10.1 C11.1 C12.1 C14.2 C16.2 C19.2 C20.2 C21.2 C22.- C23.2 C24.2 C26.2 C27.2 D3.2 D7.1 D10.A IC1.6 IC1.11 IC1.12 IC1.19 IC1.21 IC1.30 IC1.49 IC2.2 IC2.THERM J2.8 J3.1 J4.5 J4.S1 J4.S2 J4.S3 J4.S4 J4.S5 J4.S6 PS1.1 PS1.2 PS1.11 PS1.11_1 PS1.11_2 PS1.11_3 R7.1 R8.1 R10.1 R11.1 SJ5.1 SJ6.1 SJ7.1 SJ8.1 SW1.3 SW1.4 U1.2 U2.8 U2.9 U2.9_1 U2.9_2 U3.13 U4.3 X1.1 X1.3 X2.1 X2.15 X2.38 X2.P$1
GND1: C28.2 C29.2 C32.2 C33.2 C34.2 C35.1 C36.1 C37.1 C38.1 C39.1 C41.2 C43.2 C46.2 C47.2 C48.2 C49.2 C50.- C51.2 C52.2 C54.2 D6.1 D8.A D9.2 IC3.6 IC3.11 IC3.12 IC3.19 IC3.21 IC3.30 IC3.49 IC4.2 IC4.THERM J6.8 J7.1 J8.5 J8.S1 J8.S2 J8.S3 J8.S4 J8.S5 J8.S6 PS2.1 PS2.2 PS2.11 PS2.11_1 PS2.11_2 PS2.11_3 R18.1 R19.1 R22.1 R23.1 SJ1.1 SJ2.1 SJ3.1 SJ4.1 SW2.3 SW2.4 U5.13 U6.2 U7.8 U7.9 U7.9_1 U7.9_2 U8.3 X3.1 X3.15 X3.38 X3.P$1 X8.1 X8.3
GND2: C55.2 C56.2 C59.2 C60.2 C61.2 C62.1 C63.1 C64.1 C65.1 C66.1 C68.2 C70.2 C73.2 C74.2 C75.2 C76.2 C77.- C78.2 C79.2 C81.2 D13.1 D14.A D15.2 IC5.6 IC5.11 IC5.12 IC5.19 IC5.21 IC5.30 IC5.49 IC6.2 IC6.THERM J10.8 J11.1 J12.5 J12.S1 J12.S2 J12.S3 J12.S4 J12.S5 J12.S6 PS3.1 PS3.2 PS3.11 PS3.11_1 PS3.11_2 PS3.11_3 R33.1 R34.1 R36.1 R37.1 SJ11.1 SJ12.1 SJ13.1 SJ14.1 SW3.3 SW3.4 U9.13 U10.2 U11.8 U11.9 U11.9_1 U11.9_2 U12.3 X9.1 X9.15 X9.38 X9.P$1 X12.1 X12.3
GND3: C82.2 C83.2 C86.2 C87.2 C88.2 C89.1 C90.1 C91.1 C92.1 C93.1 C95.2 C97.2 C100.2 C101.2 C102.2 C103.2 C104.- C105.2 C106.2 C108.2 D18.1 D19.A D20.2 IC7.6 IC7.11 IC7.12 IC7.19 IC7.21 IC7.30 IC7.49 IC8.2 IC8.THERM J14.8 J15.1 J16.5 J16.S1 J16.S2 J16.S3 J16.S4 J16.S5 J16.S6 PS4.1 PS4.2 PS4.11 PS4.11_1 PS4.11_2 PS4.11_3 R47.1 R48.1 R50.1 R51.1 SJ16.1 SJ17.1 SJ18.1 SJ19.1 SW4.3 SW4.4 U13.13 U14.2 U15.8 U15.9 U15.9_1 U15.9_2 U16.3 X13.1 X13.15 X13.38 X13.P$1 X16.1 X16.3
GPIO0: Q6.3 X2.25
GPIO1: Q12.3 X3.25
GPIO2: X2.24
GPIO3: X3.24
GPIO4: Q18.3 X9.25
GPIO5: X9.24
GPIO6: Q24.3 X13.25
GPIO7: X13.24
HA1: IC1.41 Q3.4
HA2: IC1.36 Q3.2
HA3: IC3.41 Q9.4
HA4: IC3.36 Q9.2
HA5: IC5.41 Q15.4
HA6: IC5.36 Q15.2
HA7: IC7.41 Q21.4
HA8: IC7.36 Q21.2
HB1: IC1.1 Q1.4
HB2: IC1.44 Q1.2
HB3: IC3.44 Q7.2
HB4: IC3.1 Q7.4
HB5: IC5.44 Q13.2
HB6: IC5.1 Q13.4
HB7: IC7.44 Q19.2
HB8: IC7.1 Q19.4
IO4_CANRX: U1.4 X2.26
IO4_CANRX1: U6.4 X3.26
IO4_CANRX2: U10.4 X9.26
IO4_CANRX3: U14.4 X13.26
IO5_CANTX: U1.1 X2.29
IO5_CANTX1: U6.1 X3.29
IO5_CANTX2: U10.1 X9.29
IO5_CANTX3: U14.1 X13.29
IO15_CSN_TMC: IC1.13 X2.23
IO15_CSN_TMC1: IC3.13 X3.23
IO15_CSN_TMC2: IC5.13 X9.23
IO15_CSN_TMC3: IC7.13 X13.23
IO16_DRV_ENN: IC1.28 X2.27
IO16_DRV_ENN1: IC3.28 X3.27
IO16_DRV_ENN2: IC5.28 X9.27
IO16_DRV_ENN3: IC7.28 X13.27
IO17_CSN_AS: U3.1 X2.28
IO17_CSN_AS1: U5.1 X3.28
IO17_CSN_AS2: U9.1 X9.28
IO17_CSN_AS3: U13.1 X13.28
IO18_CSN_EXT: J2.2 X2.30
IO18_CSN_EXT1: J6.2 X3.30
IO18_CSN_EXT2: J10.2 X9.30
IO18_CSN_EXT3: J14.2 X13.30
IO19_ALG_OUT: J3.2 X2.31
IO19_ALG_OUT1: J7.2 X3.31
IO19_ALG_OUT2: J11.2 X9.31
IO19_ALG_OUT3: J15.2 X13.31
IO25_ADR1: SJ6.2 X2.10
IO25_ADR2: SJ2.2 X3.10
IO25_ADR3: SJ12.2 X9.10
IO25_ADR4: SJ17.2 X13.10
IO26_ADR1: SJ3.2 X3.11
IO26_ADR2: SJ7.2 X2.11
IO26_ADR3: SJ13.2 X9.11
IO26_ADR4: SJ18.2 X13.11
IO27_ADR1: SJ4.2 X3.12
IO27_ADR2: SJ14.2 X9.12
IO27_ADR3: SJ8.2 X2.12
IO27_ADR4: SJ19.2 X13.12
IO32_NEOPIXEL_3V1: U8.1 U8.2 X3.8
IO32_NEOPIXEL_3V2: U12.1 U12.2 X9.8
IO32_NEOPIXEL_3V3: U4.1 U4.2 X2.8
IO32_NEOPIXEL_3V4: U16.1 U16.2 X13.8
IO33_ADR0: SJ5.2 X2.9
IO33_ADR1: SJ1.2 X3.9
IO33_ADR2: SJ11.2 X9.9
IO33_ADR3: SJ16.2 X13.9
LA1: IC1.39 Q4.4
LA2: IC1.38 Q4.2
LA3: IC3.38 Q10.2
LA4: IC3.39 Q10.4
LA5: IC5.38 Q16.2
LA6: IC5.39 Q16.4
LA7: IC7.38 Q22.2
LA8: IC7.39 Q22.4
LB1: IC1.47 Q2.4
LB2: IC1.46 Q2.2
LB3: IC3.47 Q8.4
LB4: IC3.46 Q8.2
LB5: IC5.47 Q14.4
LB6: IC5.46 Q14.2
LB7: IC7.47 Q20.4
LB8: IC7.46 Q20.2
MISO: IC1.16 J2.5 U3.3 X2.14
MISO1: IC3.16 J6.5 U5.3 X3.14
MISO2: IC5.16 J10.5 U9.3 X9.14
MISO3: IC7.16 J14.5 U13.3 X13.14
MOSI: IC1.15 J2.4 U3.4 X2.16
MOSI1: IC3.15 J6.4 U5.4 X3.16
MOSI2: IC5.15 J10.4 U9.4 X9.16
MOSI3: IC7.15 J14.4 U13.4 X13.16
N$1: C25.1 U2.3
N$2: C6.1 D1.C D2.C PS1.3 PS1.4
N$3: C3.2 IC1.31
N$4: C3.1 IC1.32
N$5: C4.1 IC1.34
N$6: C25.2 U2.2
N$7: C7.1 IC1.29 R5.1
N$8: FL1.2 U1.7
N$9: Q4.1 Q4.3 R10.2 R12.1
N$10: Q2.1 Q2.3 R7.2 R9.1
N$11: FL1.3 U1.6
N$12: Q5.1 R2.2
N$13: Q6.1 R1.2
N$14: Q11.1 R14.2
N$15: D3.3 U4.4
N$16: R6.2 SJ9.2
N$17: Q12.1 R3.2
N$18: C30.2 IC3.31
N$19: C30.1 IC3.32
N$20: C31.1 IC3.34
N$21: J2.3 R21.1
N$22: C27.1 IC2.16
N$23: C34.1 IC3.29 R16.1
N$24: Q8.1 Q8.3 R18.2 R20.1
N$25: Q10.1 Q10.3 R22.2 R24.1
N$26: R25.2 SJ10.2
N$27: C33.1 D4.C D5.C PS2.3 PS2.4
N$28: J6.3 R28.1
N$29: C49.1 IC4.16
N$30: C53.1 U7.3
N$31: C53.2 U7.2
N$32: D9.3 U8.4
N$33: FL2.2 U6.7
N$34: FL2.3 U6.6
N$35: Q17.1 R30.2
N$36: Q18.1 R29.2
N$37: C57.2 IC5.31
N$38: C57.1 IC5.32
N$39: C58.1 IC5.34
N$40: C61.1 IC5.29 R32.1
N$41: Q14.1 Q14.3 R33.2 R35.1
N$42: Q16.1 Q16.3 R36.2 R38.1
N$43: R39.2 SJ15.2
N$44: C60.1 D11.C D12.C PS3.3 PS3.4
N$45: J10.3 R42.1
N$46: C76.1 IC6.16
N$47: C80.1 U11.3
N$48: C80.2 U11.2
N$49: D15.3 U12.4
N$50: FL3.2 U10.7
N$51: FL3.3 U10.6
N$52: Q23.1 R44.2
N$53: Q24.1 R43.2
N$54: C84.2 IC7.31
N$55: C84.1 IC7.32
N$56: C85.1 IC7.34
N$57: C88.1 IC7.29 R46.1
N$58: Q20.1 Q20.3 R47.2 R49.1
N$59: Q22.1 Q22.3 R50.2 R52.1
N$60: R53.2 SJ20.2
N$61: C87.1 D16.C D17.C PS4.3 PS4.4
N$62: J14.3 R56.1
N$63: C103.1 IC8.16
N$64: C107.1 U15.3
N$65: C107.2 U15.2
N$66: D20.3 U16.4
N$67: FL4.2 U14.7
N$68: FL4.3 U14.6
NEO_OUT: D3.1 J3.3
NEO_OUT1: D9.1 J7.3
NEO_OUT2: D15.1 J11.3
NEO_OUT3: D20.1 J15.3
REFL: IC1.17
REFL1: IC3.17
REFL2: IC5.17
REFL3: IC7.17
REFR: IC1.18
REFR1: IC3.18
REFR2: IC5.18
REFR3: IC7.18
RESET: C2.1 Q5.3 R4.1 SW1.1 SW1.2 X2.3
RESET1: C29.1 Q11.3 R15.1 SW2.1 SW2.2 X3.3
RESET2: C56.1 Q17.3 R31.1 SW3.1 SW3.2 X9.3
RESET3: C83.1 Q23.3 R45.1 SW4.1 SW4.2 X13.3
RTS: IC2.19 Q5.2 R1.1
RTS1: IC4.19 Q11.2 R3.1
RTS2: IC6.19 Q17.2 R29.1
RTS3: IC8.19 Q23.2 R43.1
RXD0: IC2.21 X2.34
RXD1: IC4.21 X3.34
RXD2: IC6.21 X9.34
RXD3: IC8.21 X13.34
SCK: IC1.14 R21.2 U3.2 X2.13
SCK1: IC3.14 R28.2 U5.2 X3.13
SCK2: IC5.14 R42.2 U9.2 X9.13
SCK3: IC7.14 R56.2 U13.2 X13.13
SCL: J2.7 R17.1 X2.36
SCL1: J6.7 R27.1 X3.36
SCL2: J10.7 R41.1 X9.36
SCL3: J14.7 R55.1 X13.36
SDA: J2.6 R13.1 X2.33
SDA1: J6.6 R26.1 X3.33
SDA2: J10.6 R40.1 X9.33
SDA3: J14.6 R54.1 X13.33
SRAH: IC1.8 R12.2
SRAH1: IC3.8 R24.2
SRAH2: IC5.8 R38.2
SRAH3: IC7.8 R52.2
SRAL: IC1.7 R11.2
SRAL1: IC3.7 R23.2
SRAL2: IC5.7 R37.2
SRAL3: IC7.7 R51.2
SRBH: IC1.9 R9.2
SRBH1: IC3.9 R20.2
SRBH2: IC5.9 R35.2
SRBH3: IC7.9 R49.2
SRBL: IC1.10 R8.2
SRBL1: IC3.10 R19.2
SRBL2: IC5.10 R34.2
SRBL3: IC7.10 R48.2
TMC_DIAG0: IC1.26 X2.5
TMC_DIAG1: IC1.27 X2.4
TMC_DIAG2: IC3.27 X3.4
TMC_DIAG3: IC3.26 X3.5
TMC_DIAG4: IC5.27 X9.4
TMC_DIAG5: IC5.26 X9.5
TMC_DIAG6: IC7.27 X13.4
TMC_DIAG7: IC7.26 X13.5
TXD0: IC2.20 X2.35
TXD1: IC4.20 X3.35
TXD2: IC6.20 X9.35
TXD3: IC8.20 X13.35
USBD+: D7.3 IC2.3 J4.3
USBD+1: D6.3 IC4.3 J8.3
USBD+2: D13.3 IC6.3 J12.3
USBD+3: D18.3 IC8.3 J16.3
USBD-: D7.4 IC2.4 J4.2
USBD-1: D6.4 IC4.4 J8.2
USBD-2: D13.4 IC6.4 J12.2
USBD-3: D18.4 IC8.4 J16.2
VBUS: D1.A D7.2 IC2.8 J4.1
VBUS1: D4.A D6.2 IC4.8 J8.1
VBUS2: D11.A D13.2 IC6.8 J12.1
VBUS3: D16.A D18.2 IC8.8 J16.1
VIO: U1.5
VIO1: U6.5
VIO2: U10.5
VIO3: U14.5

## Tracks (layer width: path | path; a pad name or v marks a point on that pad's centre or on a via)
+3V1  (via drill 0.2, 0.35)
  Top 0.254: v72.95,20.7 J6.1 | v60.66,40.75 60.76,40.75 61.36,40.15 61.36,38.95 61.83,38.48 X3.2
  Bottom 0.152: C51.1 71.15,34.45 72.95,34.45 74.67,36.17 75.05,36.17 75.18,36.3 75.18,37.8 75.05,37.93 75.05,38
  Bottom 0.254: C39.2 77.45,30.3 78.56,29.2 IC3.20 | C39.2 77.45,30.65 78.18,31.38 80.12,31.38 80.4,31.09 80.4,30.5 80.7,30.2 IC3.22 | C39.2 v77.45,31.8 | IC4.5 IC4.6 | IC4.6 62.55,26.75 C28.1 | C28.1 61,26.75 | C46.1 76.23,19.41 U6.3 74.23,19.41 v72.95,20.7 | IC4.7 63.2,27.35 62.55,26.7 IC4.6 | v61.06,28.09 60.95,27.97 C28.1 | C48.1 71.7,26.9 U5.12 73.17,26.6 | PS2.7 PS2.6 70.33,14.35 C32.1 | U5.11 73.17,26.6 | C47.1 74.2,29.3 74.2,26.6 | v74.3,26.15 74.3,26.25 74.2,26.35 74.2,26.6 | 74.2,26.6 73.17,26.6 | R26.2 v75.55,39.25 | v75.55,39.25 R27.2 | C32.1 68.7,14.1 | C32.1 68.4,14.35 67.68,15.08 v67.33,15.08 | C51.1 70.41,35.72 U7.1 | U7.7 72.85,38.5 73.33,38.02 73.83,38.02 73.85,38 75.05,38 75.23,38.18 75.23,38.93 v75.55,39.25 | U7.4 70.41,39.56 70.67,39.83 70.78,39.92 | 70.78,39.92 70.8,39.95 72,39.95 72.38,39.56 U7.5 | 70.78,39.92 69.96,39.92 v69.85,40.03 | R15.2 59.1,39.2 v60.65,40.75 v60.66,40.75
  pour Route15: 55.1,47.15 55.1,5.35 96.9,5.35 96.9,47.15 80,47.15 80,41.15 62,41.15 62,47.15
+3V2  (via drill 0.2, 0.35)
  Top 0.254: v27.95,62.7 J10.1 | v15.66,82.75 15.76,82.75 16.36,82.15 16.36,80.95 16.83,80.48 X9.2
  Bottom 0.152: C78.1 26.14,76.45 27.95,76.45 29.67,78.17 30.05,78.17 30.18,78.31 30.18,79.8 30.05,79.93 30.05,80
  Bottom 0.254: C66.2 32.45,72.31 33.55,71.2 IC5.20 | C66.2 32.45,72.65 33.18,73.38 35.12,73.38 35.4,73.09 35.4,72.5 35.7,72.2 IC5.22 | C66.2 v32.45,73.8 | IC6.5 IC6.6 | IC6.6 17.55,68.75 C55.1 | C55.1 16,68.75 | C73.1 31.23,61.41 U10.3 29.23,61.41 v27.95,62.7 | IC6.7 18.2,69.35 17.55,68.7 IC6.6 | v16.07,70.08 15.95,69.97 C55.1 | C75.1 26.7,68.9 U9.12 28.18,68.6 | PS3.7 PS3.6 25.32,56.35 C59.1 | U9.11 28.18,68.6 | C74.1 29.2,71.3 29.2,68.6 | v29.3,68.15 29.3,68.25 29.2,68.35 29.2,68.6 | 29.2,68.6 28.18,68.6 | R40.2 v30.55,81.25 | v30.55,81.25 R41.2 | C59.1 23.7,56.1 | C59.1 23.4,56.35 22.68,57.08 v22.33,57.08 | C78.1 25.41,77.72 U11.1 | U11.7 27.86,80.5 28.33,80.02 28.83,80.02 28.85,80 30.05,80 30.23,80.18 30.23,80.93 v30.55,81.25 | U11.4 25.41,81.56 25.68,81.83 25.77,81.92 | 25.77,81.92 25.8,81.95 27,81.95 27.39,81.56 U11.5 | 25.77,81.92 24.96,81.92 v24.85,82.03 | R31.2 14.1,81.2 v15.65,82.75 v15.66,82.75
  pour Route15: 10.1,89.15 10.1,47.35 51.9,47.35 51.9,89.15 35,89.15 35,83.15 17,83.15 17,89.15
+3V3  (via drill 0.2, 0.35)
  Top 0.254: v27.95,20.7 J2.1 | v15.66,40.75 15.76,40.75 16.36,40.15 16.36,38.95 16.83,38.48 X2.2
  Bottom 0.152: C23.1 26.14,34.45 27.95,34.45 29.67,36.17 30.05,36.17 30.18,36.3 30.18,37.8 30.05,37.93 30.05,38
  Bottom 0.254: C12.2 32.45,30.3 33.55,29.2 IC1.20 | C12.2 32.45,30.65 33.18,31.38 35.12,31.38 35.4,31.09 35.4,30.5 35.7,30.2 IC1.22 | C12.2 v32.45,31.8 | IC2.5 IC2.6 | IC2.6 17.55,26.75 C1.1 | C1.1 16,26.75 | C19.1 31.23,19.41 U1.3 29.23,19.41 v27.95,20.7 | IC2.7 18.2,27.35 17.55,26.7 IC2.6 | v16.07,28.09 15.95,27.97 C1.1 | C21.1 26.7,26.9 U3.12 28.18,26.6 | PS1.7 PS1.6 25.32,14.35 C5.1 | U3.11 28.18,26.6 | C20.1 29.2,29.3 29.2,26.6 | v29.3,26.15 29.3,26.25 29.2,26.35 29.2,26.6 | 29.2,26.6 28.18,26.6 | R13.2 v30.55,39.25 | v30.55,39.25 R17.2 | C5.1 23.7,14.1 | C5.1 23.4,14.35 22.68,15.08 v22.33,15.08 | C23.1 25.41,35.72 U2.1 | U2.7 27.86,38.5 28.33,38.02 28.83,38.02 28.85,38 30.05,38 30.23,38.18 30.23,38.93 v30.55,39.25 | U2.4 25.41,39.56 25.68,39.83 25.77,39.92 | 25.77,39.92 25.8,39.95 27,39.95 27.39,39.56 U2.5 | 25.77,39.92 24.96,39.92 v24.85,40.03 | R4.2 14.1,39.2 v15.65,40.75 v15.66,40.75
  pour Route15: 10.1,47.15 10.1,5.35 51.9,5.35 51.9,47.15 35,47.15 35,41.15 17,41.15 17,47.15
+3V4  (via drill 0.2, 0.35)
  Top 0.254: v72.95,62.7 J14.1 | v60.66,82.75 60.76,82.75 61.36,82.15 61.36,80.95 61.83,80.48 X13.2
  Bottom 0.152: C105.1 71.15,76.45 72.95,76.45 74.67,78.17 75.05,78.17 75.18,78.31 75.18,79.8 75.05,79.93 75.05,80
  Bottom 0.254: C93.2 77.45,72.31 78.56,71.2 IC7.20 | C93.2 77.45,72.65 78.18,73.38 80.12,73.38 80.4,73.09 80.4,72.5 80.7,72.2 IC7.22 | C93.2 v77.45,73.8 | IC8.5 IC8.6 | IC8.6 62.55,68.75 C82.1 | C82.1 61,68.75 | C100.1 76.23,61.41 U14.3 74.23,61.41 v72.95,62.7 | IC8.7 63.2,69.35 62.55,68.7 IC8.6 | v61.06,70.08 60.95,69.97 C82.1 | C102.1 71.7,68.9 U13.12 73.17,68.6 | PS4.7 PS4.6 70.33,56.35 C86.1 | U13.11 73.17,68.6 | C101.1 74.2,71.3 74.2,68.6 | v74.3,68.15 74.3,68.25 74.2,68.35 74.2,68.6 | 74.2,68.6 73.17,68.6 | R54.2 v75.55,81.25 | v75.55,81.25 R55.2 | C86.1 68.7,56.1 | C86.1 68.4,56.35 67.68,57.08 v67.33,57.08 | C105.1 70.41,77.72 U15.1 | U15.7 72.85,80.5 73.33,80.02 73.83,80.02 73.85,80 75.05,80 75.23,80.18 75.23,80.93 v75.55,81.25 | U15.4 70.41,81.56 70.67,81.83 70.78,81.92 | 70.78,81.92 70.8,81.95 72,81.95 72.38,81.56 U15.5 | 70.78,81.92 69.96,81.92 v69.85,82.03 | R45.2 59.1,81.2 v60.65,82.75 v60.66,82.75
  pour Route15: 55.1,89.15 55.1,47.35 96.9,47.35 96.9,89.15 80,89.15 80,83.15 62,83.15 62,89.15
+5V  (via drill 0.2)
  Route15 0.254: v40.27,21.46 38.54,21.46 38.24,21.17 37.76,21.17 37.24,21.68 37.24,33.86 v35.6,35.5
  Bottom 0.254: IC1.5 41.45,21.95 40.9,21.4 40.3,21.4 | 40.3,21.4 39.8,21.4 39.4,21 C10.2 | 40.3,21.4 40.3,21.43 v40.27,21.46 | R5.2 36.55,36.45 v35.6,35.5
+5V1  (via drill 0.2)
  Route15 0.254: v85.27,21.46 83.54,21.46 83.24,21.17 82.76,21.17 82.24,21.68 82.24,33.86 v80.6,35.5
  Bottom 0.254: IC3.5 86.45,21.95 85.9,21.4 85.3,21.4 | 85.3,21.4 84.8,21.4 84.4,21 C37.2 | 85.3,21.4 85.3,21.43 v85.27,21.46 | R16.2 81.55,36.45 v80.6,35.5
+5V2  (via drill 0.2)
  Route15 0.254: v40.27,63.47 38.54,63.47 38.24,63.17 37.76,63.17 37.24,63.68 37.24,75.86 v35.6,77.5
  Bottom 0.254: IC5.5 41.45,63.95 40.9,63.4 40.3,63.4 | 40.3,63.4 39.8,63.4 39.4,63 C64.2 | 40.3,63.4 40.3,63.43 v40.27,63.47 | R32.2 36.55,78.45 v35.6,77.5
+5V3  (via drill 0.2)
  Route15 0.254: v85.27,63.47 83.54,63.47 83.24,63.17 82.76,63.17 82.24,63.68 82.24,75.86 v80.6,77.5
  Bottom 0.254: IC7.5 86.45,63.95 85.9,63.4 85.3,63.4 | 85.3,63.4 84.8,63.4 84.4,63 C91.2 | 85.3,63.4 85.3,63.43 v85.27,63.47 | R46.2 81.55,78.45 v80.6,77.5
+5V_LED  (via drill 0.2)
  Top 0.152: D3.4 40.23,44.6 v43.65,44.6
  Top 0.254: v28.2,39.93 26.66,39.93 26.03,39.93 25.34,39.25 24.7,39.25 24.4,38.95 v21.6,38.95 | D3.4 38.45,45.6 v38.3,45.45
  Route15 0.152: 28.2,39.85 v28.2,39.93
  Bottom 0.152: v38.3,45.45 38.05,45.2 36.6,45.2 36.1,44.7 36.1,40.95 35.65,40.5 30.2,40.5 29.2,39.5 C24.1 | v43.65,44.6 44.55,43.7 44.6,43.7 45.15,43.15 45.15,41.85 45.89,41.11 46.05,41.11 47.05,40.11 47.55,40.11 48.24,39.41 J3.4
  Bottom 0.254: U2.6 29.15,39 C24.1 28.22,39.93 v28.2,39.93 | U4.5 21.4,37.87 | 21.4,37.87 21.54,37.87 C26.1 | v21.6,38.95 21.7,38.85 21.7,38.16 21.4,37.87
+5V_LED1  (via drill 0.2)
  Top 0.152: D9.4 85.22,44.6 v88.65,44.6
  Top 0.254: v73.2,39.93 71.66,39.93 71.03,39.93 70.34,39.25 69.7,39.25 69.4,38.95 v66.6,38.95 | D9.4 83.45,45.6 v83.3,45.45
  Route15 0.152: 73.2,39.85 v73.2,39.93
  Bottom 0.152: v83.3,45.45 83.05,45.2 81.6,45.2 81.1,44.7 81.1,40.95 80.65,40.5 75.2,40.5 74.2,39.5 C52.1 | v88.65,44.6 89.55,43.7 89.6,43.7 90.15,43.15 90.15,41.85 90.89,41.11 91.05,41.11 92.05,40.11 92.55,40.11 93.24,39.41 J7.4
  Bottom 0.254: U7.6 74.15,39 C52.1 73.22,39.93 v73.2,39.93 | U8.5 66.4,37.87 | 66.4,37.87 66.53,37.87 C54.1 | v66.6,38.95 66.7,38.85 66.7,38.16 66.4,37.87
+5V_LED2  (via drill 0.2)
  Top 0.152: D15.4 40.23,86.6 v43.65,86.6
  Top 0.254: v28.2,81.93 26.66,81.93 26.03,81.93 25.34,81.25 24.7,81.25 24.4,80.95 v21.6,80.95 | D15.4 38.45,87.6 v38.3,87.45
  Route15 0.152: 28.2,81.85 v28.2,81.93
  Bottom 0.152: v38.3,87.45 38.05,87.2 36.6,87.2 36.1,86.7 36.1,82.95 35.65,82.5 30.2,82.5 29.2,81.5 C79.1 | v43.65,86.6 44.55,85.7 44.6,85.7 45.15,85.15 45.15,83.85 45.89,83.11 46.05,83.11 47.05,82.11 47.55,82.11 48.24,81.41 J11.4
  Bottom 0.254: U11.6 29.15,81 C79.1 28.22,81.93 v28.2,81.93 | U12.5 21.4,79.86 | 21.4,79.86 21.54,79.86 C81.1 | v21.6,80.95 21.7,80.85 21.7,80.17 21.4,79.86
+5V_LED3  (via drill 0.2)
  Top 0.152: D20.4 85.22,86.6 v88.65,86.6
  Top 0.254: v73.2,81.93 71.66,81.93 71.03,81.93 70.34,81.25 69.7,81.25 69.4,80.95 v66.6,80.95 | D20.4 83.45,87.6 v83.3,87.45
  Route15 0.152: 73.2,81.85 v73.2,81.93
  Bottom 0.152: v83.3,87.45 83.05,87.2 81.6,87.2 81.1,86.7 81.1,82.95 80.65,82.5 75.2,82.5 74.2,81.5 C106.1 | v88.65,86.6 89.55,85.7 89.6,85.7 90.15,85.15 90.15,83.85 90.89,83.11 91.05,83.11 92.05,82.11 92.55,82.11 93.24,81.41 J15.4
  Bottom 0.254: U15.6 74.15,81 C106.1 73.22,81.93 v73.2,81.93 | U16.5 66.4,79.86 | 66.4,79.86 66.53,79.86 C108.1 | v66.6,80.95 66.7,80.85 66.7,80.17 66.4,79.86
+12V
  Bottom 0.254: IC1.3 42.45,23.05 43.65,21.85 45.05,21.85 C11.2
+12V1
  Bottom 0.254: IC3.3 87.45,23.05 88.65,21.85 90.05,21.85 C38.2
+12V2
  Bottom 0.254: IC5.3 42.45,65.05 43.65,63.85 45.05,63.85 C65.2
+12V3
  Bottom 0.254: IC7.3 87.45,65.05 88.65,63.85 90.05,63.85 C92.2
+24V  (via drill 0.2, 0.35)
  Top 0.254: Q3.8 41.2,32.17 v41.94,31.43 | v41.55,16.76 41.65,16.86 41.65,18.15
  Top 0.508: Q3.7 Q3.8 | Q3.7 40.44,34.75 41.15,34.75 41.2,34.7 Q3.8 | Q3.7 39.94,34.05 40.14,33.85 40.91,33.85 41.2,34.15 Q3.8 | Q1.7 40.89,18.5 41.45,18.5 Q1.8 | Q1.7 40.53,18.11 40.7,17.95 | 40.7,17.95 40.9,17.75 41.3,17.75 | 41.3,17.75 41.5,17.75 41.8,18.05 Q1.8 | Q1.7 40.7,17.98 40.7,17.95 | Q1.7 40.9,18.15 41.05,18 | 41.05,18 41.3,17.75 | Q1.8 41.65,18.15 | 41.2,18.15 41.05,18
  Top 1.27: 36.3,18.15 Q1.5 Q1.6 Q1.7 | 36.3,18.15 34.5,16.35 34.5,15.41 C22.+ 32.1,13.09 X1.4 32.1,11.05 33.45,9.7 37.65,9.7 39.1,11.15 X1.2 | 36.3,18.15 36.9,18.75 36.9,33.76 Q3.5 Q3.6 Q3.7 40.03,34.35 40.5,34.35
  Bottom 0.254: IC1.4 41.95,22.9 43.35,21.5 C9.2 C8.2 | C8.2 43.4,18.2 C16.1 46.5,17.15 47.3,17.15 47.55,16.9 47.55,13.65 47.16,13.9 C14.1 | v41.94,31.43 v41.95,31.44 IC1.33 41.95,33.6 43.1,34.75 C4.2 | C8.2 41.86,16.76 v41.55,16.76
  Bottom 0.406: 36.05,8.8 D2.A
  Bottom 0.61: D10.C 39.42,8.2 D2.A 32.55,12.3 X1.4
+24V1  (via drill 0.2, 0.35)
  Top 0.254: Q9.8 86.2,32.17 v86.94,31.43 | v86.55,16.76 86.65,16.86 86.65,18.15
  Top 0.508: Q9.7 Q9.8 | Q9.7 85.44,34.75 86.15,34.75 86.2,34.7 Q9.8 | Q9.7 84.94,34.05 85.14,33.85 85.91,33.85 86.2,34.15 Q9.8 | Q7.7 85.89,18.5 86.45,18.5 Q7.8 | Q7.7 85.53,18.11 85.7,17.95 | 85.7,17.95 85.9,17.75 86.3,17.75 | 86.3,17.75 86.5,17.75 86.81,18.05 Q7.8 | Q7.7 85.7,17.98 85.7,17.95 | Q7.7 85.9,18.15 86.05,18 | 86.05,18 86.3,17.75 | Q7.8 86.65,18.15 | 86.2,18.15 86.05,18
  Top 1.27: 81.3,18.15 Q7.5 Q7.6 Q7.7 | 81.3,18.15 79.5,16.35 79.5,15.41 C50.+ 77.1,13.09 X8.4 77.1,11.05 78.45,9.7 82.65,9.7 84.1,11.15 X8.2 | 81.3,18.15 81.9,18.75 81.9,33.76 Q9.5 Q9.6 Q9.7 85.03,34.35 85.5,34.35
  Bottom 0.254: IC3.4 86.95,22.9 88.35,21.5 C36.2 C35.2 | C35.2 88.4,18.2 C43.1 91.5,17.15 92.3,17.15 92.55,16.9 92.55,13.65 92.16,13.9 C41.1 | v86.94,31.43 v86.95,31.44 IC3.33 86.95,33.6 88.1,34.75 C31.2 | C35.2 86.86,16.76 v86.55,16.76
  Bottom 0.406: 81.05,8.8 D5.A
  Bottom 0.61: D8.C 84.42,8.2 D5.A 77.55,12.3 X8.4
+24V2  (via drill 0.2, 0.35)
  Top 0.254: Q15.8 41.2,74.17 v41.94,73.43 | v41.55,58.76 41.65,58.86 41.65,60.15
  Top 0.508: Q15.7 Q15.8 | Q15.7 40.44,76.75 41.15,76.75 41.2,76.69 Q15.8 | Q15.7 39.94,76.05 40.14,75.85 40.91,75.85 41.2,76.15 Q15.8 | Q13.7 40.89,60.5 41.45,60.5 Q13.8 | Q13.7 40.53,60.12 40.7,59.95 | 40.7,59.95 40.9,59.75 41.3,59.75 | 41.3,59.75 41.5,59.75 41.8,60.05 Q13.8 | Q13.7 40.7,59.98 40.7,59.95 | Q13.7 40.9,60.15 41.05,60 | 41.05,60 41.3,59.75 | Q13.8 41.65,60.15 | 41.2,60.15 41.05,60
  Top 1.27: 36.3,60.15 Q13.5 Q13.6 Q13.7 | 36.3,60.15 34.5,58.35 34.5,57.41 C77.+ 32.1,55.09 X12.4 32.1,53.05 33.45,51.7 37.65,51.7 39.1,53.15 X12.2 | 36.3,60.15 36.9,60.75 36.9,75.75 Q15.5 Q15.6 Q15.7 40.03,76.35 40.5,76.35
  Bottom 0.254: IC5.4 41.95,64.9 43.35,63.5 C63.2 C62.2 | C62.2 43.4,60.2 C70.1 46.5,59.15 47.3,59.15 47.55,58.9 47.55,55.65 47.16,55.9 C68.1 | v41.94,73.43 v41.95,73.44 IC5.33 41.95,75.6 43.1,76.75 C58.2 | C62.2 41.86,58.76 v41.55,58.76
  Bottom 0.406: 36.05,50.8 D12.A
  Bottom 0.61: D14.C 39.42,50.2 D12.A 32.55,54.3 X12.4
+24V3  (via drill 0.2, 0.35)
  Top 0.254: Q21.8 86.2,74.17 v86.94,73.43 | v86.55,58.76 86.65,58.86 86.65,60.15
  Top 0.508: Q21.7 Q21.8 | Q21.7 85.44,76.75 86.15,76.75 86.2,76.69 Q21.8 | Q21.7 84.94,76.05 85.14,75.85 85.91,75.85 86.2,76.15 Q21.8 | Q19.7 85.89,60.5 86.45,60.5 Q19.8 | Q19.7 85.53,60.12 85.7,59.95 | 85.7,59.95 85.9,59.75 86.3,59.75 | 86.3,59.75 86.5,59.75 86.81,60.05 Q19.8 | Q19.7 85.7,59.98 85.7,59.95 | Q19.7 85.9,60.15 86.05,60 | 86.05,60 86.3,59.75 | Q19.8 86.65,60.15 | 86.2,60.15 86.05,60
  Top 1.27: 81.3,60.15 Q19.5 Q19.6 Q19.7 | 81.3,60.15 79.5,58.35 79.5,57.41 C104.+ 77.1,55.09 X16.4 77.1,53.05 78.45,51.7 82.65,51.7 84.1,53.15 X16.2 | 81.3,60.15 81.9,60.75 81.9,75.75 Q21.5 Q21.6 Q21.7 85.03,76.35 85.5,76.35
  Bottom 0.254: IC7.4 86.95,64.9 88.35,63.5 C90.2 C89.2 | C89.2 88.4,60.2 C97.1 91.5,59.15 92.3,59.15 92.55,58.9 92.55,55.65 92.16,55.9 C95.1 | v86.94,73.43 v86.95,73.44 IC7.33 86.95,75.6 88.1,76.75 C85.2 | C89.2 86.86,58.76 v86.55,58.76
  Bottom 0.406: 81.05,50.8 D17.A
  Bottom 0.61: D19.C 84.42,50.2 D17.A 77.55,54.3 X16.4
BMA1
  Top 0.152: 42.95,34.45 42.95,35.55
  Top 0.254: Q4.5 43.05,34.25 | Q4.5 42.43,34.28 43.66,34.28 | Q4.5 42.4,34.7 42.95,35.25 | Q4.6 43.46,34.45
  Top 0.406: Q4.5 42.6,34.45 42.95,34.45 43.46,34.45 | Q4.6 43.25,34.66
  Top 0.508: 43.05,34.25 Q4.6 | 43.66,34.28 Q4.6 | Q4.5 42.65,33.99 42.65,33.75 43.2,33.75 43.5,33.75 43.66,33.91 Q4.6
  Top 1.1: Q3.3 38.66,37.44 39.9,36.2 42.3,36.2 42.95,35.55 | 42.95,35.25 42.95,34.45
  Top 1.27: 43.2,33.75 43.35,33.6 43.35,32.6 45.09,30.71 J1.2
  Bottom 0.254: J1.2 49.14,30.86 47.85,32.15 C17.2 46.8,31.2 46.8,30 46.5,29.7 IC1.40
BMA2  (via drill 0.2)
  Top 0.254: v45.3,32.3 45.3,33.55 44.9,33.95 | v44.28,37.87 44.28,37.62
  Top 0.508: Q4.7 44.98,34.3 45.55,34.3 45.6,34.25 Q4.8 45.85,33.9 44.9,33.9 44.9,33.95 44.9,34.22 Q4.7
  Top 1.1: Q3.1 41.2,38.15 41.73,37.62 43.13,37.62 | 45.55,33.25 45.55,34.3 45.55,35.2 43.13,37.62 | 43.13,37.62 44.28,37.62
  Top 1.27: 45.55,33.25 J1.1
  Bottom 0.254: IC1.37 45.3,31.62 v45.3,32.3 | C18.1 45.1,37.05 v44.28,37.87
BMA3  (via drill 0.2)
  Top 0.254: v90.3,32.3 90.3,33.55 89.9,33.95 | v89.28,37.87 89.28,37.62
  Top 0.508: Q10.7 89.98,34.3 90.55,34.3 90.6,34.25 Q10.8 90.86,33.9 89.9,33.9 89.9,33.95 89.9,34.22 Q10.7
  Top 1.1: Q9.1 86.2,38.15 86.73,37.62 88.13,37.62 | 90.55,33.25 90.55,34.3 90.55,35.2 88.13,37.62 | 88.13,37.62 89.28,37.62
  Top 1.27: 90.55,33.25 J5.1
  Bottom 0.254: IC3.37 90.3,31.62 v90.3,32.3 | C45.1 90.1,37.05 v89.28,37.87
BMA4
  Top 0.152: 87.95,34.45 87.95,35.55
  Top 0.254: Q10.5 88.05,34.25 | Q10.5 87.43,34.28 88.67,34.28 | Q10.5 87.39,34.7 87.95,35.25 | Q10.6 88.46,34.45
  Top 0.406: Q10.5 87.6,34.45 87.95,34.45 88.46,34.45 | Q10.6 88.25,34.66
  Top 0.508: 88.05,34.25 Q10.6 | 88.67,34.28 Q10.6 | Q10.5 87.65,33.99 87.65,33.75 88.2,33.75 88.5,33.75 88.67,33.91 Q10.6
  Top 1.1: Q9.3 83.67,37.44 84.9,36.2 87.3,36.2 87.95,35.55 | 87.95,35.25 87.95,34.45
  Top 1.27: 88.2,33.75 88.35,33.6 88.35,32.6 90.09,30.71 J5.2
  Bottom 0.254: J5.2 94.14,30.86 92.85,32.15 C44.2 91.8,31.2 91.8,30 91.5,29.7 IC3.40
BMA5  (via drill 0.2)
  Top 0.254: v45.3,74.3 45.3,75.55 44.9,75.95 | v44.28,79.87 44.28,79.62
  Top 0.508: Q16.7 44.98,76.3 45.55,76.3 45.6,76.25 Q16.8 45.85,75.9 44.9,75.9 44.9,75.95 44.9,76.22 Q16.7
  Top 1.1: Q15.1 41.2,80.14 41.73,79.62 43.13,79.62 | 45.55,75.25 45.55,76.3 45.55,77.2 43.13,79.62 | 43.13,79.62 44.28,79.62
  Top 1.27: 45.55,75.25 J9.1
  Bottom 0.254: IC5.37 45.3,73.62 v45.3,74.3 | C72.1 45.1,79.05 v44.28,79.87
BMA6
  Top 0.152: 42.95,76.45 42.95,77.55
  Top 0.254: Q16.5 43.05,76.25 | Q16.5 42.43,76.28 43.66,76.28 | Q16.5 42.4,76.69 42.95,77.25 | Q16.6 43.46,76.45
  Top 0.406: Q16.5 42.6,76.45 42.95,76.45 43.46,76.45 | Q16.6 43.25,76.67
  Top 0.508: 43.05,76.25 Q16.6 | 43.66,76.28 Q16.6 | Q16.5 42.65,76 42.65,75.75 43.2,75.75 43.5,75.75 43.66,75.92 Q16.6
  Top 1.1: Q15.3 38.66,79.44 39.9,78.2 42.3,78.2 42.95,77.55 | 42.95,77.25 42.95,76.45
  Top 1.27: 43.2,75.75 43.35,75.6 43.35,74.6 45.09,72.71 J9.2
  Bottom 0.254: J9.2 49.14,72.86 47.85,74.15 C71.2 46.8,73.2 46.8,72 46.5,71.7 IC5.40
BMA7  (via drill 0.2)
  Top 0.254: v90.3,74.3 90.3,75.55 89.9,75.95 | v89.28,79.87 89.28,79.62
  Top 0.508: Q22.7 89.98,76.3 90.55,76.3 90.6,76.25 Q22.8 90.86,75.9 89.9,75.9 89.9,75.95 89.9,76.22 Q22.7
  Top 1.1: Q21.1 86.2,80.14 86.73,79.62 88.13,79.62 | 90.55,75.25 90.55,76.3 90.55,77.2 88.13,79.62 | 88.13,79.62 89.28,79.62
  Top 1.27: 90.55,75.25 J13.1
  Bottom 0.254: IC7.37 90.3,73.62 v90.3,74.3 | C99.1 90.1,79.05 v89.28,79.87
BMA8
  Top 0.152: 87.95,76.45 87.95,77.55
  Top 0.254: Q22.5 88.05,76.25 | Q22.5 87.43,76.28 88.67,76.28 | Q22.5 87.39,76.69 87.95,77.25 | Q22.6 88.46,76.45
  Top 0.406: Q22.5 87.6,76.45 87.95,76.45 88.46,76.45 | Q22.6 88.25,76.67
  Top 0.508: 88.05,76.25 Q22.6 | 88.67,76.28 Q22.6 | Q22.5 87.65,76 87.65,75.75 88.2,75.75 88.5,75.75 88.67,75.92 Q22.6
  Top 1.1: Q21.3 83.67,79.44 84.9,78.2 87.3,78.2 87.95,77.55 | 87.95,77.25 87.95,76.45
  Top 1.27: 88.2,75.75 88.35,75.6 88.35,74.6 90.09,72.71 J13.2
  Bottom 0.254: J13.2 94.14,72.86 92.85,74.15 C98.2 91.8,73.2 91.8,72 91.5,71.7 IC7.40
BMB1  (via drill 0.2)
  Top 0.152: v47.7,23.2 47.16,23.2 Q2.5
  Top 0.254: v43.68,25.94 43.7,25.93 43.7,25.2
  Top 0.508: Q2.6 46.03,23.05 46.4,23.05 46.7,23.05 Q2.5
  Top 1.016: 39.27,24.86 39.6,25.2
  Top 1.18: 39.6,25.2 43.7,25.2 45.55,25.2 45.6,25.15